# EAGLE board schematic (EAGLE 8.7.1), part 1 of 4
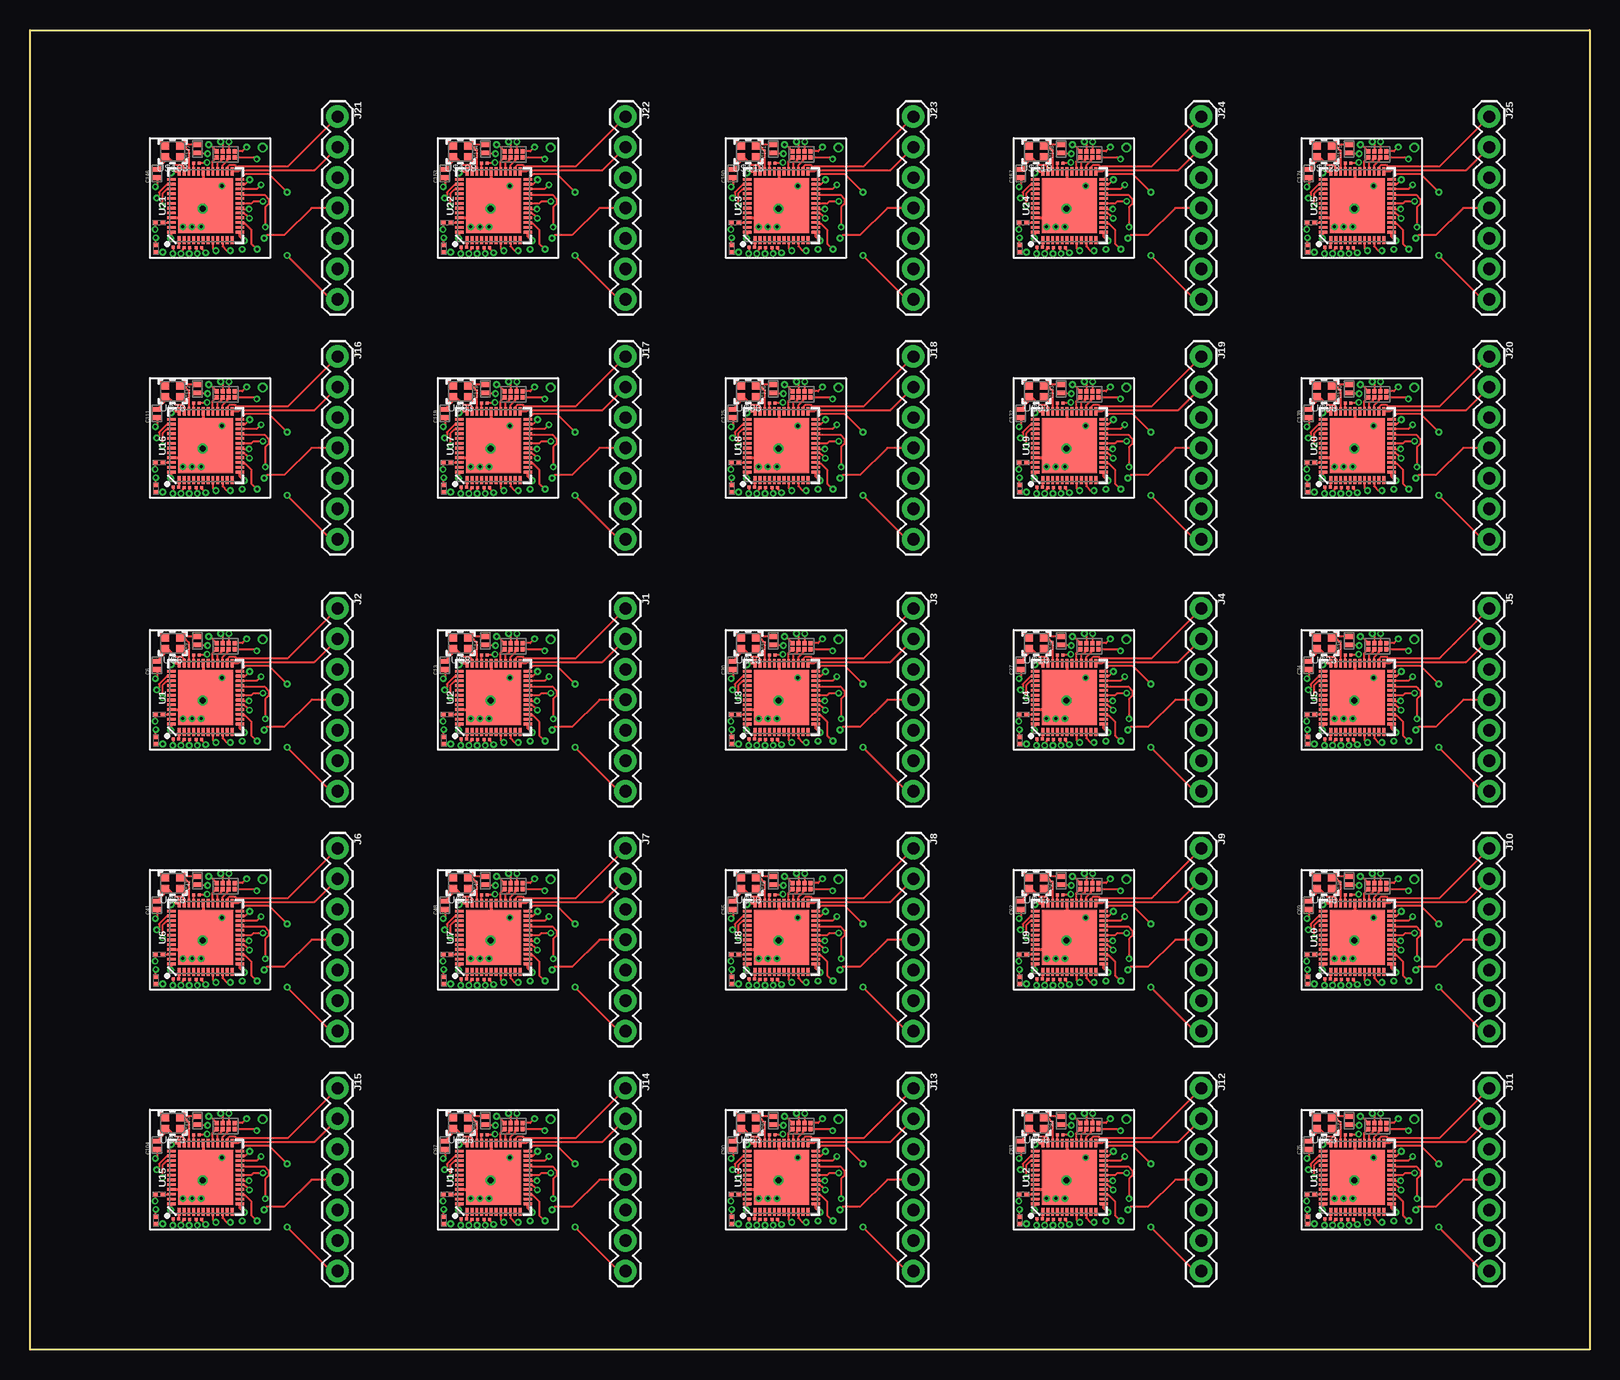
[diagram p0: board, top side]
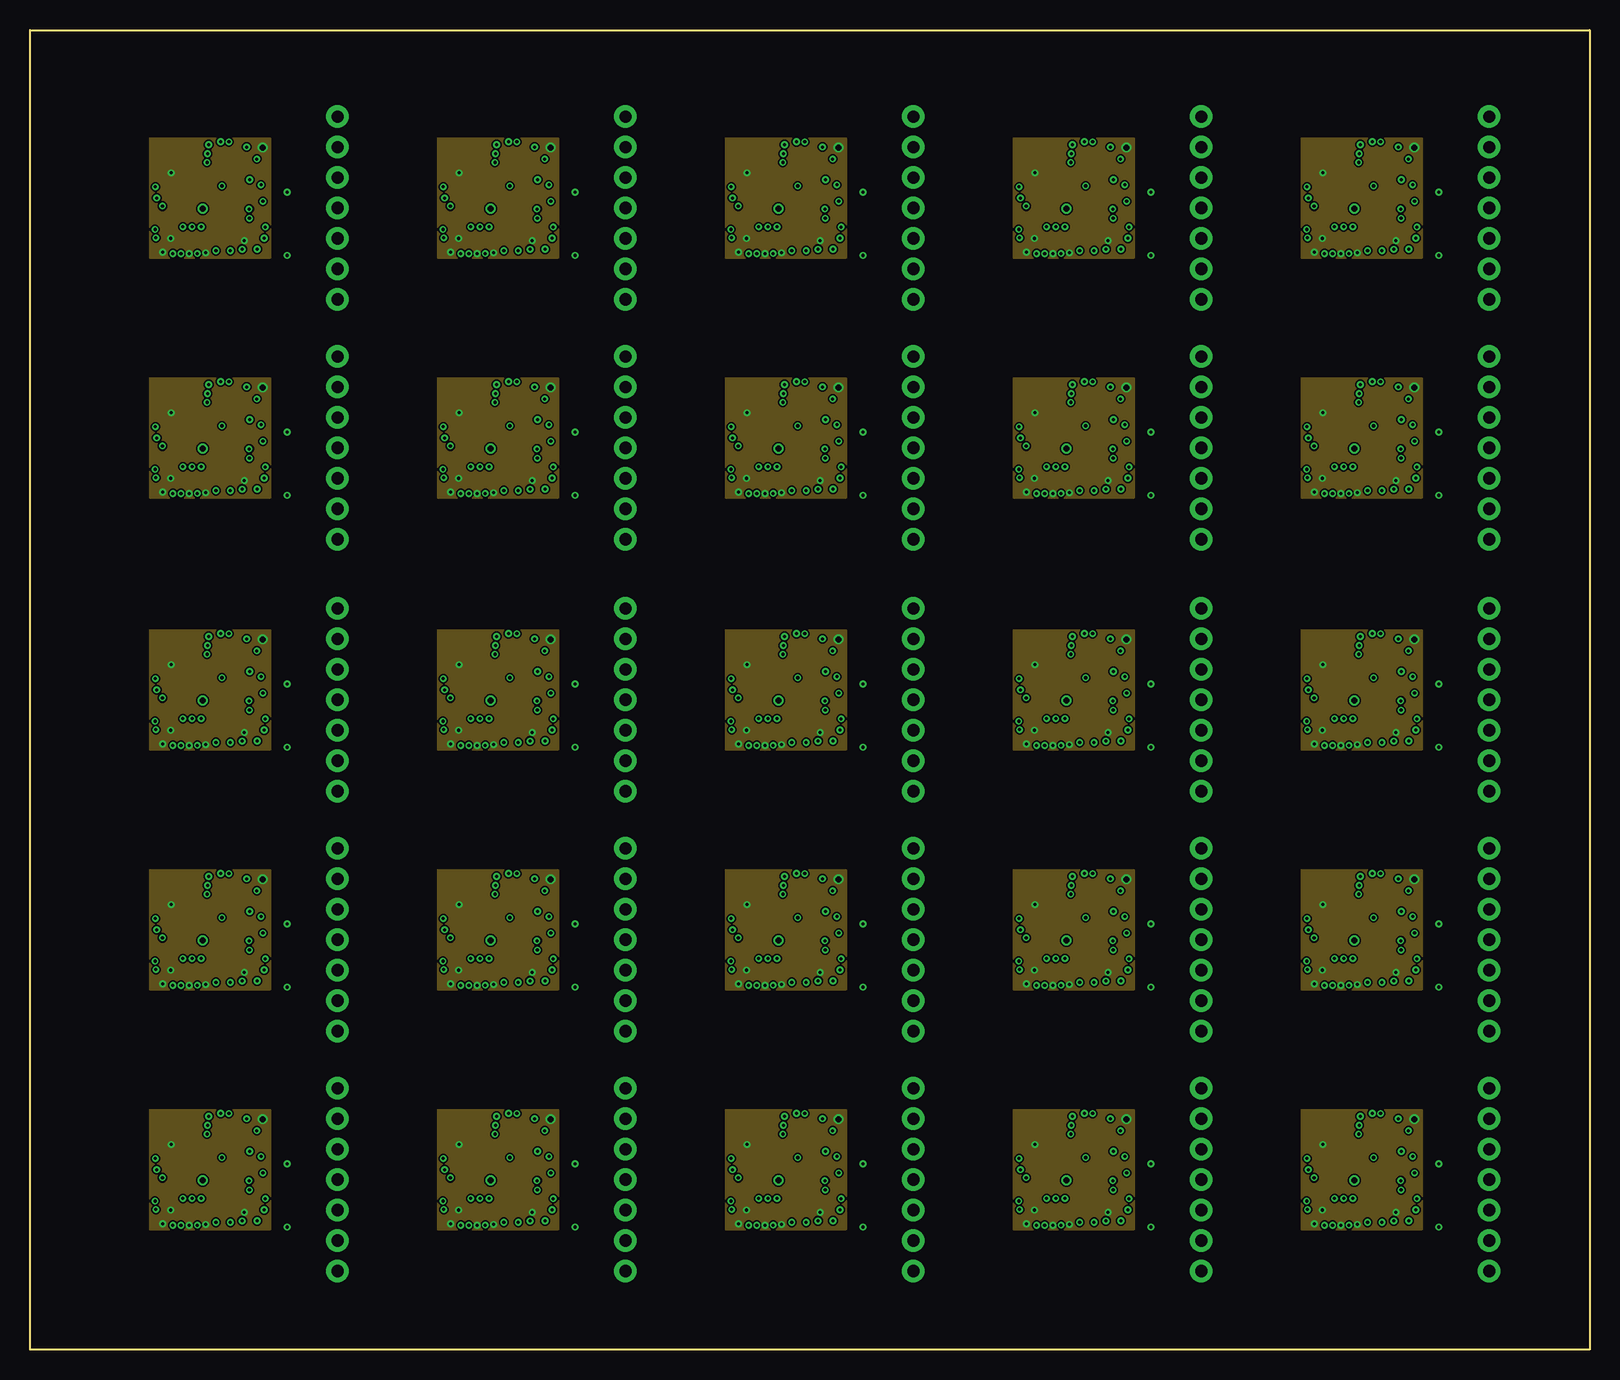
[diagram p1: board, inner layer Route8]
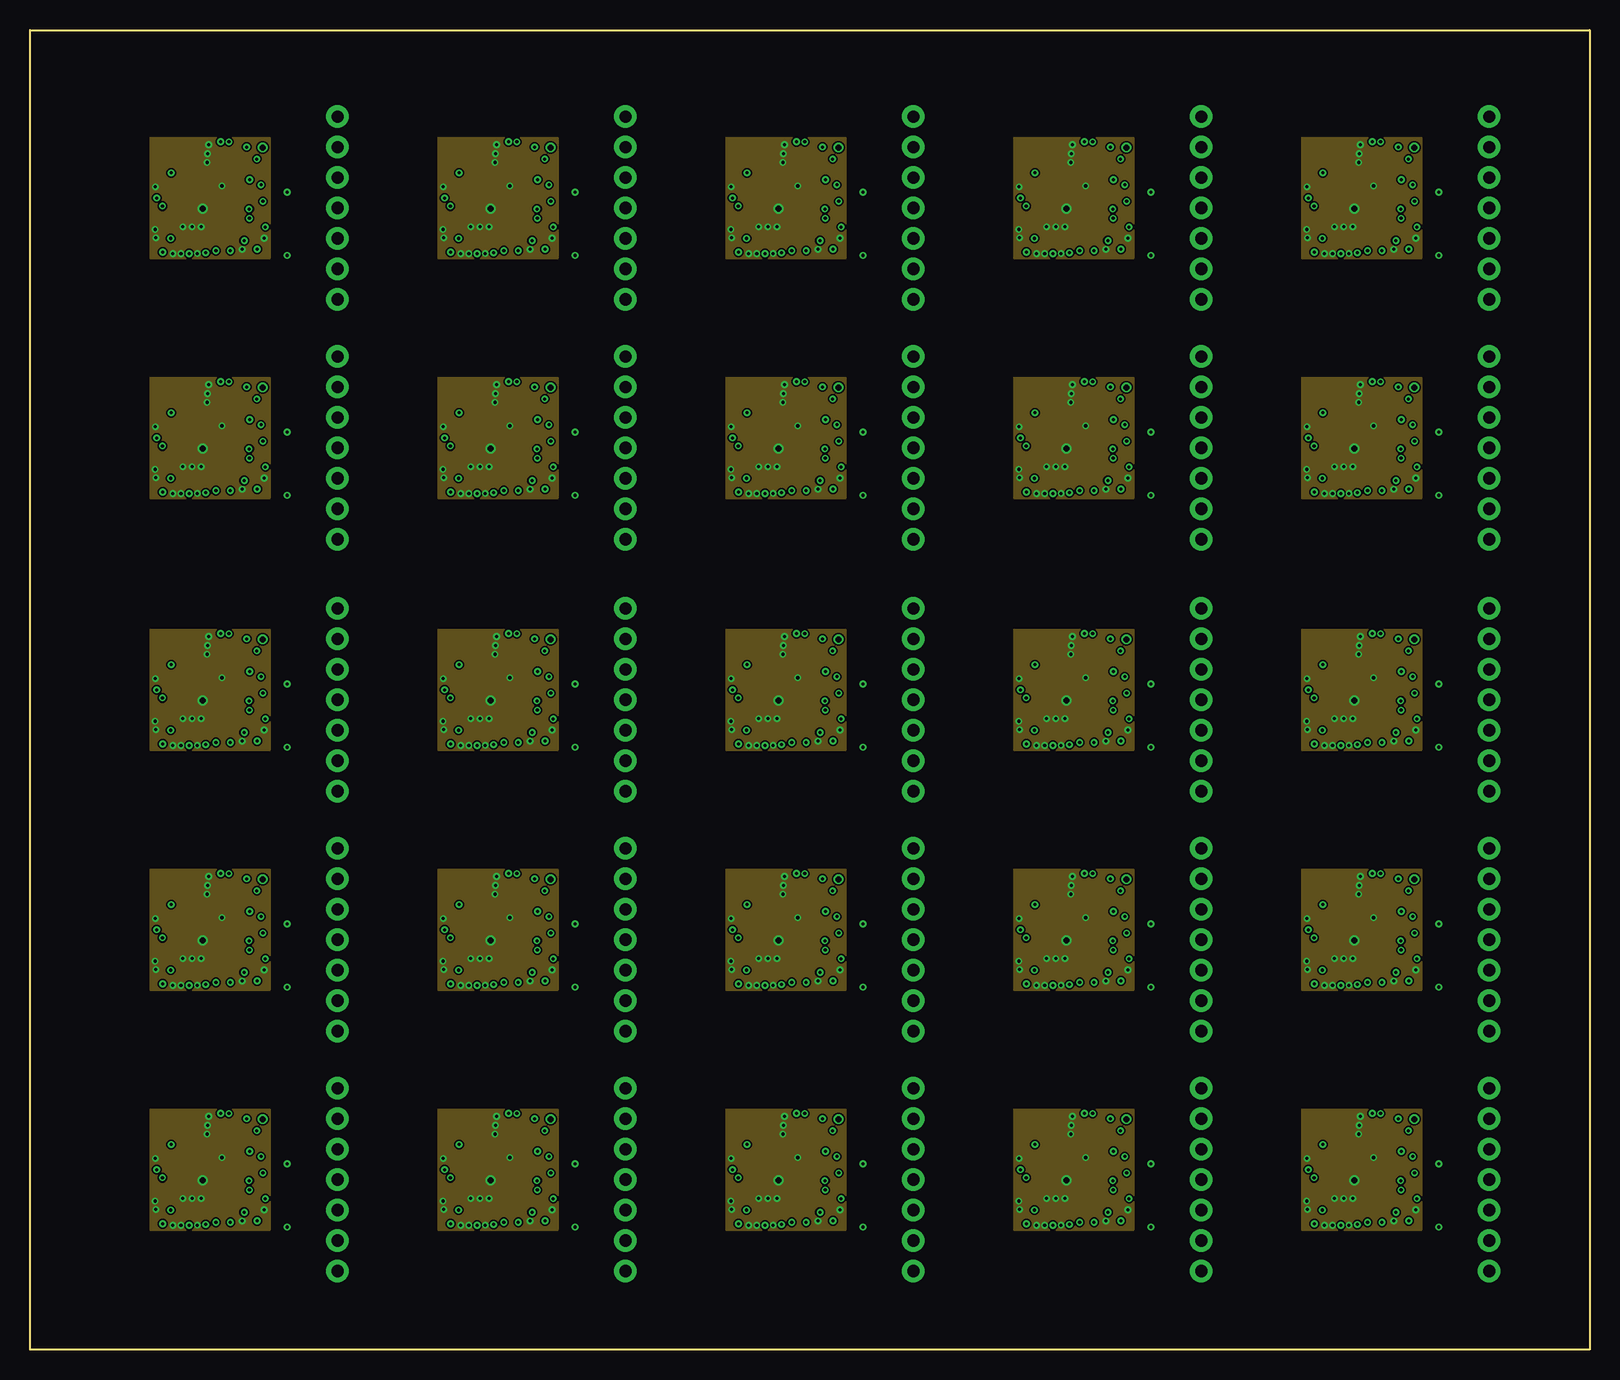
[diagram p2: board, inner layer Route10]
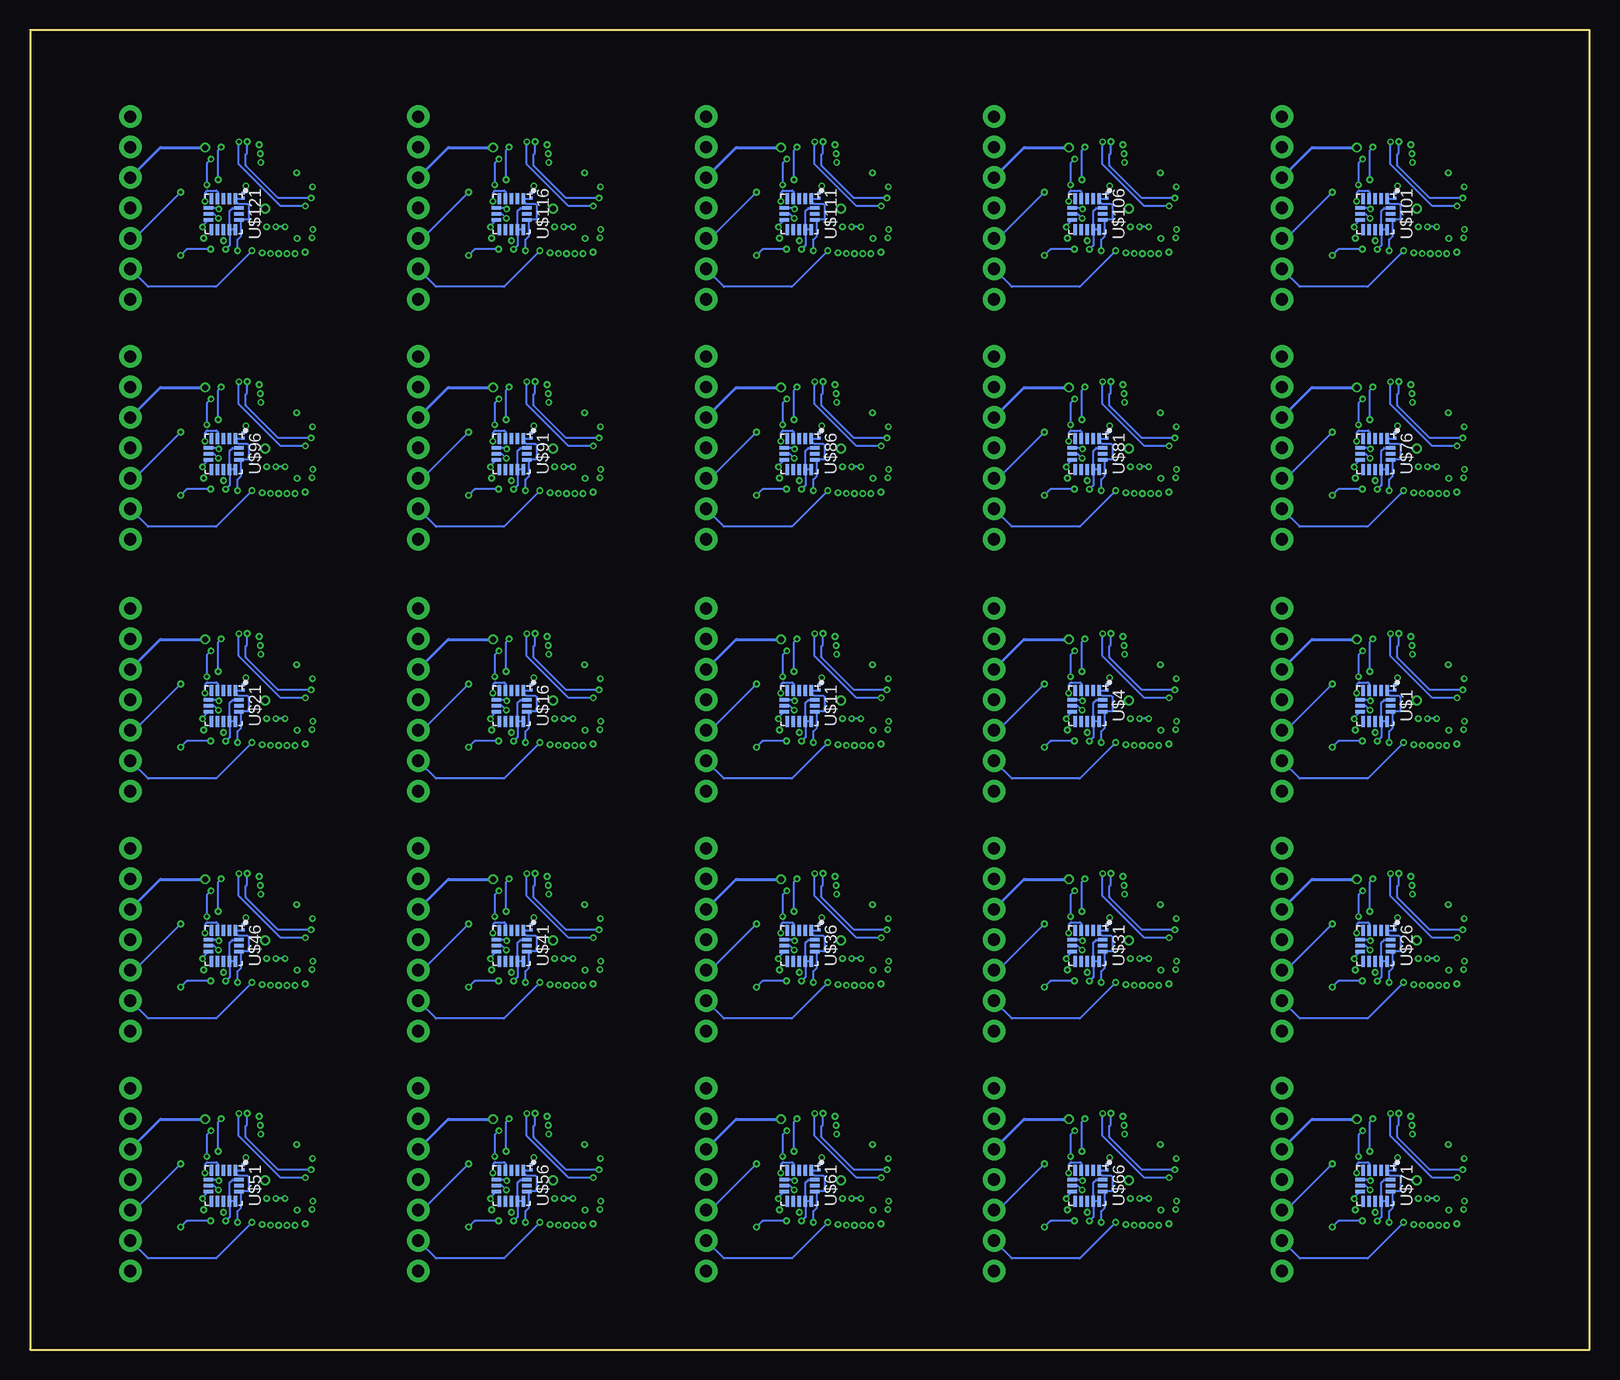
[diagram p3: board, bottom side, seen from below]

Size 130 x 110 mm. Coordinates in mm from the lower left corner, seen from the top.
Outline: 130,0 0,0 0,110 130,110 130,0
Copper layers (1*8*10*16): Top 0.035mm / dielectric 0.42mm / Route8 0.035mm / dielectric 0.62mm / Route10 0.035mm / dielectric 0.42mm / Bottom 0.035mm
Design rules "default *": minimum track width 6mil, minimum drill 10mil, track to track 5mil, track to pad 5mil, pad to pad 5mil, via to via 5mil, smd to smd 2mil, copper to edge 40mil, drill to drill 6mil, minimum pad ring 10mil, minimum via ring 6mil, stop-mask expansion 4mil, vias tented up to drill 0mil, thermal gap 10mil

## Footprints (pad centres in the part's own frame; a part is rotated, then mirrored left to right if it is on the bottom)
CAP_0402-L = smd 0.25 x 0.25: 1 -0.229,0; 2 0.229,0
CAPC1005X55N = smd 0.4 x 0.6: 1 -0.4,0; 2 0.3,0
1X07 = drill 1.016 pad 1.88: 1 0,0; 2 2.54,0; 3 5.08,0; 4 7.62,0; 5 10.16,0; 6 12.7,0; 7 15.24,0
QFN48-6X6MM = smd 0.68 x 0.23: 1 -2.86,2.2; 2 -2.86,1.8; 3 -2.86,1.4; 4 -2.86,1; 5 -2.86,0.6; 6 -2.86,0.2; 7 -2.86,-0.2; 8 -2.86,-0.6; 9 -2.86,-1; 10 -2.86,-1.4; 11 -2.86,-1.8; 12 -2.86,-2.2; 25 2.86,-2.2; 26 2.86,-1.8; 27 2.86,-1.4; 28 2.86,-1; 29 2.86,-0.6; 30 2.86,-0.2; 31 2.86,0.2; 32 2.86,0.6; 33 2.86,1; 34 2.86,1.4; 35 2.86,1.8; 36 2.86,2.2 | smd 0.23 x 0.68: 13 -2.2,-2.86; 14 -1.8,-2.86; 15 -1.4,-2.86; 16 -1,-2.86; 17 -0.6,-2.86; 18 -0.2,-2.86; 19 0.2,-2.86; 20 0.6,-2.86; 21 1,-2.86; 22 1.4,-2.86; 23 1.8,-2.86; 24 2.2,-2.86; 37 2.2,2.86; 38 1.8,2.86; 39 1.4,2.86; 40 1,2.86; 41 0.6,2.86; 42 0.2,2.86; 43 -0.2,2.86; 44 -0.6,2.86; 45 -1,2.86; 46 -1.4,2.86; 47 -1.8,2.86; 48 -2.2,2.86 | smd 4.6 x 4.6: EP 0,0
TFLGA-16/3.3MMX3.1MM = smd 0.3 x 0.8: CS 0.5,-1.275; GND@3 -0.5,1.275; MISO 0,-1.275; MOSI -0.5,-1.275; NC@2 0,1.275; VS 0.5,1.275 | smd 0.925 x 0.3: GND@1 1.288,0.5; GND@2 1.288,1; INT1 1.288,0; INT2 1.288,-1; NC@1 -1.288,0.5; RESERVED@1 -1.288,0; RESERVED@2 -1.288,-1; RESERVED@3 1.288,-0.5; SCLK -1.288,-0.5; VDD/IO -1.288,1
4P7UFCAPACITOR = smd 0.35 x 0.4: P$3 0.18,0.15; P$4 0.8,0.15
AT25SF161-UUD-T = smd 0.35 x 0.35: 1 1.2,0.9; 2 1.2,0.4; 3 1.2,-0.1; 4 1.2,-0.6; 5 0.7,0.9; 6 0.7,0.4; 7 0.7,-0.1; 8 0.7,-0.6
32MHZCRYSTAL = smd 0.75 x 0.7: 1 0.485,0.47; 2 1.835,0.47; 3 1.835,1.47; 4 0.485,1.47
1UFCAPACITOR = smd 0.35 x 0.4: P$3 0.18,0.15; P$4 0.8,0.15

## Placement (x,y rotation side)
C1  C0402X5R0G104M020BCCAP_0402-L  [CAP_0402-L]  16.24,55.19 270 bottom
C2  C0402X5R0G104M020BCCAP_0402-L  [CAP_0402-L]  12.19,50.88 180 top
C3  C0402X5R0G104M020BCCAP_0402-L  [CAP_0402-L]  14.07,50.87 0 top
C4  C0402X5R0G104M020BCCAP_0402-L  [CAP_0402-L]  13.09,50.87 0 top
C5  C0402C0G1C101J020BCCAP_0402-L  [CAP_0402-L]  13.86,57.88 0 top
C6  GRM1555C1H6R0CA01D  [CAPC1005X55N]  10.59,57.08 90 top
C7  GRM1555C1H6R0CA01D  [CAPC1005X55N]  13.96,59.14 90 top
C8  C0402X5R0G104M020BCCAP_0402-L  [CAP_0402-L]  40.24,55.19 270 bottom
C9  C0402X5R0G104M020BCCAP_0402-L  [CAP_0402-L]  36.19,50.88 180 top
C10  C0402X5R0G104M020BCCAP_0402-L  [CAP_0402-L]  38.07,50.87 0 top
C11  C0402X5R0G104M020BCCAP_0402-L  [CAP_0402-L]  37.09,50.87 0 top
C12  C0402C0G1C101J020BCCAP_0402-L  [CAP_0402-L]  37.86,57.88 0 top
C13  GRM1555C1H6R0CA01D  [CAPC1005X55N]  34.59,57.08 90 top
C14  GRM1555C1H6R0CA01D  [CAPC1005X55N]  37.96,59.14 90 top
C15  C0402X5R0G104M020BCCAP_0402-L  [CAP_0402-L]  64.24,55.19 270 bottom
C16  C0402X5R0G104M020BCCAP_0402-L  [CAP_0402-L]  60.19,50.88 180 top
C17  C0402X5R0G104M020BCCAP_0402-L  [CAP_0402-L]  62.07,50.87 0 top
C18  C0402X5R0G104M020BCCAP_0402-L  [CAP_0402-L]  61.09,50.87 0 top
C19  C0402C0G1C101J020BCCAP_0402-L  [CAP_0402-L]  61.86,57.88 0 top
C20  GRM1555C1H6R0CA01D  [CAPC1005X55N]  58.59,57.08 90 top
C21  GRM1555C1H6R0CA01D  [CAPC1005X55N]  61.96,59.14 90 top
C22  C0402X5R0G104M020BCCAP_0402-L  [CAP_0402-L]  88.24,55.19 270 bottom
C23  C0402X5R0G104M020BCCAP_0402-L  [CAP_0402-L]  84.19,50.88 180 top
C24  C0402X5R0G104M020BCCAP_0402-L  [CAP_0402-L]  86.07,50.87 0 top
C25  C0402X5R0G104M020BCCAP_0402-L  [CAP_0402-L]  85.09,50.87 0 top
C26  C0402C0G1C101J020BCCAP_0402-L  [CAP_0402-L]  85.86,57.88 0 top
C27  GRM1555C1H6R0CA01D  [CAPC1005X55N]  82.59,57.08 90 top
C28  GRM1555C1H6R0CA01D  [CAPC1005X55N]  85.96,59.14 90 top
C29  C0402X5R0G104M020BCCAP_0402-L  [CAP_0402-L]  112.24,55.19 270 bottom
C30  C0402X5R0G104M020BCCAP_0402-L  [CAP_0402-L]  108.19,50.88 180 top
C31  C0402X5R0G104M020BCCAP_0402-L  [CAP_0402-L]  110.07,50.87 0 top
C32  C0402X5R0G104M020BCCAP_0402-L  [CAP_0402-L]  109.09,50.87 0 top
C33  C0402C0G1C101J020BCCAP_0402-L  [CAP_0402-L]  109.86,57.88 0 top
C34  GRM1555C1H6R0CA01D  [CAPC1005X55N]  106.59,57.08 90 top
C35  GRM1555C1H6R0CA01D  [CAPC1005X55N]  109.96,59.14 90 top
C36  C0402X5R0G104M020BCCAP_0402-L  [CAP_0402-L]  16.24,35.19 270 bottom
C37  C0402X5R0G104M020BCCAP_0402-L  [CAP_0402-L]  12.19,30.88 180 top
C38  C0402X5R0G104M020BCCAP_0402-L  [CAP_0402-L]  14.07,30.87 0 top
C39  C0402X5R0G104M020BCCAP_0402-L  [CAP_0402-L]  13.09,30.87 0 top
C40  C0402C0G1C101J020BCCAP_0402-L  [CAP_0402-L]  13.86,37.88 0 top
C41  GRM1555C1H6R0CA01D  [CAPC1005X55N]  10.59,37.08 90 top
C42  GRM1555C1H6R0CA01D  [CAPC1005X55N]  13.96,39.14 90 top
C43  C0402X5R0G104M020BCCAP_0402-L  [CAP_0402-L]  40.24,35.19 270 bottom
C44  C0402X5R0G104M020BCCAP_0402-L  [CAP_0402-L]  36.19,30.88 180 top
C45  C0402X5R0G104M020BCCAP_0402-L  [CAP_0402-L]  38.07,30.87 0 top
C46  C0402X5R0G104M020BCCAP_0402-L  [CAP_0402-L]  37.09,30.87 0 top
C47  C0402C0G1C101J020BCCAP_0402-L  [CAP_0402-L]  37.86,37.88 0 top
C48  GRM1555C1H6R0CA01D  [CAPC1005X55N]  34.59,37.08 90 top
C49  GRM1555C1H6R0CA01D  [CAPC1005X55N]  37.96,39.14 90 top
C50  C0402X5R0G104M020BCCAP_0402-L  [CAP_0402-L]  64.24,35.19 270 bottom
C51  C0402X5R0G104M020BCCAP_0402-L  [CAP_0402-L]  60.19,30.88 180 top
C52  C0402X5R0G104M020BCCAP_0402-L  [CAP_0402-L]  62.07,30.87 0 top
C53  C0402X5R0G104M020BCCAP_0402-L  [CAP_0402-L]  61.09,30.87 0 top
C54  C0402C0G1C101J020BCCAP_0402-L  [CAP_0402-L]  61.86,37.88 0 top
C55  GRM1555C1H6R0CA01D  [CAPC1005X55N]  58.59,37.08 90 top
C56  GRM1555C1H6R0CA01D  [CAPC1005X55N]  61.96,39.14 90 top
C57  C0402X5R0G104M020BCCAP_0402-L  [CAP_0402-L]  88.24,35.19 270 bottom
C58  C0402X5R0G104M020BCCAP_0402-L  [CAP_0402-L]  84.19,30.88 180 top
C59  C0402X5R0G104M020BCCAP_0402-L  [CAP_0402-L]  86.07,30.87 0 top
C60  C0402X5R0G104M020BCCAP_0402-L  [CAP_0402-L]  85.09,30.87 0 top
C61  C0402C0G1C101J020BCCAP_0402-L  [CAP_0402-L]  85.86,37.88 0 top
C62  GRM1555C1H6R0CA01D  [CAPC1005X55N]  82.59,37.08 90 top
C63  GRM1555C1H6R0CA01D  [CAPC1005X55N]  85.96,39.14 90 top
C64  C0402X5R0G104M020BCCAP_0402-L  [CAP_0402-L]  112.24,35.19 270 bottom
C65  C0402X5R0G104M020BCCAP_0402-L  [CAP_0402-L]  108.19,30.88 180 top
C66  C0402X5R0G104M020BCCAP_0402-L  [CAP_0402-L]  110.07,30.87 0 top
C67  C0402X5R0G104M020BCCAP_0402-L  [CAP_0402-L]  109.09,30.87 0 top
C68  C0402C0G1C101J020BCCAP_0402-L  [CAP_0402-L]  109.86,37.88 0 top
C69  GRM1555C1H6R0CA01D  [CAPC1005X55N]  106.59,37.08 90 top
C70  GRM1555C1H6R0CA01D  [CAPC1005X55N]  109.96,39.14 90 top
C71  C0402X5R0G104M020BCCAP_0402-L  [CAP_0402-L]  112.24,15.19 270 bottom
C72  C0402X5R0G104M020BCCAP_0402-L  [CAP_0402-L]  108.19,10.88 180 top
C73  C0402X5R0G104M020BCCAP_0402-L  [CAP_0402-L]  110.07,10.87 0 top
C74  C0402X5R0G104M020BCCAP_0402-L  [CAP_0402-L]  109.09,10.87 0 top
C75  C0402C0G1C101J020BCCAP_0402-L  [CAP_0402-L]  109.86,17.88 0 top
C76  GRM1555C1H6R0CA01D  [CAPC1005X55N]  106.59,17.08 90 top
C77  GRM1555C1H6R0CA01D  [CAPC1005X55N]  109.96,19.14 90 top
C78  C0402X5R0G104M020BCCAP_0402-L  [CAP_0402-L]  88.24,15.19 270 bottom
C79  C0402X5R0G104M020BCCAP_0402-L  [CAP_0402-L]  84.19,10.88 180 top
C80  C0402X5R0G104M020BCCAP_0402-L  [CAP_0402-L]  86.07,10.87 0 top
C81  C0402X5R0G104M020BCCAP_0402-L  [CAP_0402-L]  85.09,10.87 0 top
C82  C0402C0G1C101J020BCCAP_0402-L  [CAP_0402-L]  85.86,17.88 0 top
C83  GRM1555C1H6R0CA01D  [CAPC1005X55N]  82.59,17.08 90 top
C84  GRM1555C1H6R0CA01D  [CAPC1005X55N]  85.96,19.14 90 top
C85  C0402X5R0G104M020BCCAP_0402-L  [CAP_0402-L]  64.24,15.19 270 bottom
C86  C0402X5R0G104M020BCCAP_0402-L  [CAP_0402-L]  60.19,10.88 180 top
C87  C0402X5R0G104M020BCCAP_0402-L  [CAP_0402-L]  62.07,10.87 0 top
C88  C0402X5R0G104M020BCCAP_0402-L  [CAP_0402-L]  61.09,10.87 0 top
C89  C0402C0G1C101J020BCCAP_0402-L  [CAP_0402-L]  61.86,17.88 0 top
C90  GRM1555C1H6R0CA01D  [CAPC1005X55N]  58.59,17.08 90 top
C91  GRM1555C1H6R0CA01D  [CAPC1005X55N]  61.96,19.14 90 top
C92  C0402X5R0G104M020BCCAP_0402-L  [CAP_0402-L]  40.24,15.19 270 bottom
C93  C0402X5R0G104M020BCCAP_0402-L  [CAP_0402-L]  36.19,10.88 180 top
C94  C0402X5R0G104M020BCCAP_0402-L  [CAP_0402-L]  38.07,10.87 0 top
C95  C0402X5R0G104M020BCCAP_0402-L  [CAP_0402-L]  37.09,10.87 0 top
C96  C0402C0G1C101J020BCCAP_0402-L  [CAP_0402-L]  37.86,17.88 0 top
C97  GRM1555C1H6R0CA01D  [CAPC1005X55N]  34.59,17.08 90 top
C98  GRM1555C1H6R0CA01D  [CAPC1005X55N]  37.96,19.14 90 top
C99  C0402X5R0G104M020BCCAP_0402-L  [CAP_0402-L]  16.24,15.19 270 bottom
C100  C0402X5R0G104M020BCCAP_0402-L  [CAP_0402-L]  12.19,10.88 180 top
C101  C0402X5R0G104M020BCCAP_0402-L  [CAP_0402-L]  14.07,10.87 0 top
C102  C0402X5R0G104M020BCCAP_0402-L  [CAP_0402-L]  13.09,10.87 0 top
C103  C0402C0G1C101J020BCCAP_0402-L  [CAP_0402-L]  13.86,17.88 0 top
C104  GRM1555C1H6R0CA01D  [CAPC1005X55N]  10.59,17.08 90 top
C105  GRM1555C1H6R0CA01D  [CAPC1005X55N]  13.96,19.14 90 top
C106  C0402X5R0G104M020BCCAP_0402-L  [CAP_0402-L]  16.24,76.19 270 bottom
C107  C0402X5R0G104M020BCCAP_0402-L  [CAP_0402-L]  12.19,71.88 180 top
C108  C0402X5R0G104M020BCCAP_0402-L  [CAP_0402-L]  14.07,71.87 0 top
C109  C0402X5R0G104M020BCCAP_0402-L  [CAP_0402-L]  13.09,71.87 0 top
C110  C0402C0G1C101J020BCCAP_0402-L  [CAP_0402-L]  13.86,78.88 0 top
C111  GRM1555C1H6R0CA01D  [CAPC1005X55N]  10.59,78.08 90 top
C112  GRM1555C1H6R0CA01D  [CAPC1005X55N]  13.96,80.14 90 top
C113  C0402X5R0G104M020BCCAP_0402-L  [CAP_0402-L]  40.24,76.19 270 bottom
C114  C0402X5R0G104M020BCCAP_0402-L  [CAP_0402-L]  36.19,71.88 180 top
C115  C0402X5R0G104M020BCCAP_0402-L  [CAP_0402-L]  38.07,71.87 0 top
C116  C0402X5R0G104M020BCCAP_0402-L  [CAP_0402-L]  37.09,71.87 0 top
C117  C0402C0G1C101J020BCCAP_0402-L  [CAP_0402-L]  37.86,78.88 0 top
C118  GRM1555C1H6R0CA01D  [CAPC1005X55N]  34.59,78.08 90 top
C119  GRM1555C1H6R0CA01D  [CAPC1005X55N]  37.96,80.14 90 top
C120  C0402X5R0G104M020BCCAP_0402-L  [CAP_0402-L]  64.24,76.19 270 bottom
C121  C0402X5R0G104M020BCCAP_0402-L  [CAP_0402-L]  60.19,71.88 180 top
C122  C0402X5R0G104M020BCCAP_0402-L  [CAP_0402-L]  62.07,71.87 0 top
C123  C0402X5R0G104M020BCCAP_0402-L  [CAP_0402-L]  61.09,71.87 0 top
C124  C0402C0G1C101J020BCCAP_0402-L  [CAP_0402-L]  61.86,78.88 0 top
C125  GRM1555C1H6R0CA01D  [CAPC1005X55N]  58.59,78.08 90 top
C126  GRM1555C1H6R0CA01D  [CAPC1005X55N]  61.96,80.14 90 top
C127  C0402X5R0G104M020BCCAP_0402-L  [CAP_0402-L]  88.24,76.19 270 bottom
C128  C0402X5R0G104M020BCCAP_0402-L  [CAP_0402-L]  84.19,71.88 180 top
C129  C0402X5R0G104M020BCCAP_0402-L  [CAP_0402-L]  86.07,71.87 0 top
C130  C0402X5R0G104M020BCCAP_0402-L  [CAP_0402-L]  85.09,71.87 0 top
C131  C0402C0G1C101J020BCCAP_0402-L  [CAP_0402-L]  85.86,78.88 0 top
C132  GRM1555C1H6R0CA01D  [CAPC1005X55N]  82.59,78.08 90 top
C133  GRM1555C1H6R0CA01D  [CAPC1005X55N]  85.96,80.14 90 top
C134  C0402X5R0G104M020BCCAP_0402-L  [CAP_0402-L]  112.24,76.19 270 bottom
C135  C0402X5R0G104M020BCCAP_0402-L  [CAP_0402-L]  108.19,71.88 180 top
C136  C0402X5R0G104M020BCCAP_0402-L  [CAP_0402-L]  110.07,71.87 0 top
C137  C0402X5R0G104M020BCCAP_0402-L  [CAP_0402-L]  109.09,71.87 0 top
C138  C0402C0G1C101J020BCCAP_0402-L  [CAP_0402-L]  109.86,78.88 0 top
C139  GRM1555C1H6R0CA01D  [CAPC1005X55N]  106.59,78.08 90 top
C140  GRM1555C1H6R0CA01D  [CAPC1005X55N]  109.96,80.14 90 top
C141  C0402X5R0G104M020BCCAP_0402-L  [CAP_0402-L]  16.24,96.19 270 bottom
C142  C0402X5R0G104M020BCCAP_0402-L  [CAP_0402-L]  12.19,91.88 180 top
C143  C0402X5R0G104M020BCCAP_0402-L  [CAP_0402-L]  14.07,91.87 0 top
C144  C0402X5R0G104M020BCCAP_0402-L  [CAP_0402-L]  13.09,91.87 0 top
C145  C0402C0G1C101J020BCCAP_0402-L  [CAP_0402-L]  13.86,98.88 0 top
C146  GRM1555C1H6R0CA01D  [CAPC1005X55N]  10.59,98.08 90 top
C147  GRM1555C1H6R0CA01D  [CAPC1005X55N]  13.96,100.14 90 top
C148  C0402X5R0G104M020BCCAP_0402-L  [CAP_0402-L]  40.24,96.19 270 bottom
C149  C0402X5R0G104M020BCCAP_0402-L  [CAP_0402-L]  36.19,91.88 180 top
C150  C0402X5R0G104M020BCCAP_0402-L  [CAP_0402-L]  38.07,91.87 0 top
C151  C0402X5R0G104M020BCCAP_0402-L  [CAP_0402-L]  37.09,91.87 0 top
C152  C0402C0G1C101J020BCCAP_0402-L  [CAP_0402-L]  37.86,98.88 0 top
C153  GRM1555C1H6R0CA01D  [CAPC1005X55N]  34.59,98.08 90 top
C154  GRM1555C1H6R0CA01D  [CAPC1005X55N]  37.96,100.14 90 top
C155  C0402X5R0G104M020BCCAP_0402-L  [CAP_0402-L]  64.24,96.19 270 bottom
C156  C0402X5R0G104M020BCCAP_0402-L  [CAP_0402-L]  60.19,91.88 180 top
C157  C0402X5R0G104M020BCCAP_0402-L  [CAP_0402-L]  62.07,91.87 0 top
C158  C0402X5R0G104M020BCCAP_0402-L  [CAP_0402-L]  61.09,91.87 0 top
C159  C0402C0G1C101J020BCCAP_0402-L  [CAP_0402-L]  61.86,98.88 0 top
C160  GRM1555C1H6R0CA01D  [CAPC1005X55N]  58.59,98.08 90 top
C161  GRM1555C1H6R0CA01D  [CAPC1005X55N]  61.96,100.14 90 top
C162  C0402X5R0G104M020BCCAP_0402-L  [CAP_0402-L]  88.24,96.19 270 bottom
C163  C0402X5R0G104M020BCCAP_0402-L  [CAP_0402-L]  84.19,91.88 180 top
C164  C0402X5R0G104M020BCCAP_0402-L  [CAP_0402-L]  86.07,91.87 0 top
C165  C0402X5R0G104M020BCCAP_0402-L  [CAP_0402-L]  85.09,91.87 0 top
C166  C0402C0G1C101J020BCCAP_0402-L  [CAP_0402-L]  85.86,98.88 0 top
C167  GRM1555C1H6R0CA01D  [CAPC1005X55N]  82.59,98.08 90 top
C168  GRM1555C1H6R0CA01D  [CAPC1005X55N]  85.96,100.14 90 top
C169  C0402X5R0G104M020BCCAP_0402-L  [CAP_0402-L]  112.24,96.19 270 bottom
C170  C0402X5R0G104M020BCCAP_0402-L  [CAP_0402-L]  108.19,91.88 180 top
C171  C0402X5R0G104M020BCCAP_0402-L  [CAP_0402-L]  110.07,91.87 0 top
C172  C0402X5R0G104M020BCCAP_0402-L  [CAP_0402-L]  109.09,91.87 0 top
C173  C0402C0G1C101J020BCCAP_0402-L  [CAP_0402-L]  109.86,98.88 0 top
C174  GRM1555C1H6R0CA01D  [CAPC1005X55N]  106.59,98.08 90 top
C175  GRM1555C1H6R0CA01D  [CAPC1005X55N]  109.96,100.14 90 top
J1  header  [1X07]  49.64,61.78 270 top
J2  header  [1X07]  25.64,61.78 270 top
J3  header  [1X07]  73.64,61.78 270 top
J4  header  [1X07]  97.64,61.78 270 top
J5  header  [1X07]  121.64,61.78 270 top
J6  header  [1X07]  25.64,41.78 270 top
J7  header  [1X07]  49.64,41.78 270 top
J8  header  [1X07]  73.64,41.78 270 top
J9  header  [1X07]  97.64,41.78 270 top
J10  header  [1X07]  121.64,41.78 270 top
J11  header  [1X07]  121.64,21.78 270 top
J12  header  [1X07]  97.64,21.78 270 top
J13  header  [1X07]  73.64,21.78 270 top
J14  header  [1X07]  49.64,21.78 270 top
J15  header  [1X07]  25.64,21.78 270 top
J16  header  [1X07]  25.64,82.78 270 top
J17  header  [1X07]  49.64,82.78 270 top
J18  header  [1X07]  73.64,82.78 270 top
J19  header  [1X07]  97.64,82.78 270 top
J20  header  [1X07]  121.64,82.78 270 top
J21  header  [1X07]  25.64,102.78 270 top
J22  header  [1X07]  49.64,102.78 270 top
J23  header  [1X07]  73.64,102.78 270 top
J24  header  [1X07]  97.64,102.78 270 top
J25  header  [1X07]  121.64,102.78 270 top
U1  NRF52832  [QFN48-6X6MM]  14.65,54.35 90 top
U2  NRF52832  [QFN48-6X6MM]  38.65,54.35 90 top
U3  NRF52832  [QFN48-6X6MM]  62.65,54.35 90 top
U4  NRF52832  [QFN48-6X6MM]  86.65,54.35 90 top
U5  NRF52832  [QFN48-6X6MM]  110.65,54.35 90 top
U6  NRF52832  [QFN48-6X6MM]  14.65,34.35 90 top
U7  NRF52832  [QFN48-6X6MM]  38.65,34.35 90 top
U8  NRF52832  [QFN48-6X6MM]  62.65,34.35 90 top
U9  NRF52832  [QFN48-6X6MM]  86.65,34.35 90 top
U10  NRF52832  [QFN48-6X6MM]  110.65,34.35 90 top
U11  NRF52832  [QFN48-6X6MM]  110.65,14.35 90 top
U12  NRF52832  [QFN48-6X6MM]  86.65,14.35 90 top
U13  NRF52832  [QFN48-6X6MM]  62.65,14.35 90 top
U14  NRF52832  [QFN48-6X6MM]  38.65,14.35 90 top
U15  NRF52832  [QFN48-6X6MM]  14.65,14.35 90 top
U16  NRF52832  [QFN48-6X6MM]  14.65,75.35 90 top
U17  NRF52832  [QFN48-6X6MM]  38.65,75.35 90 top
U18  NRF52832  [QFN48-6X6MM]  62.65,75.35 90 top
U19  NRF52832  [QFN48-6X6MM]  86.65,75.35 90 top
U20  NRF52832  [QFN48-6X6MM]  110.65,75.35 90 top
U21  NRF52832  [QFN48-6X6MM]  14.65,95.35 90 top
U22  NRF52832  [QFN48-6X6MM]  38.65,95.35 90 top
U23  NRF52832  [QFN48-6X6MM]  62.65,95.35 90 top
U24  NRF52832  [QFN48-6X6MM]  86.65,95.35 90 top
U25  NRF52832  [QFN48-6X6MM]  110.65,95.35 90 top
U$1  ADXL362  [TFLGA-16/3.3MMX3.1MM]  17.86,53.66 270 bottom
U$2  4P7UFCAPACITOR  [4P7UFCAPACITOR]  10.65,50.28 90 top
U$3  AT25SF161-UUD-T  [AT25SF161-UUD-T]  16.17,59.58 270 top
U$4  ADXL362  [TFLGA-16/3.3MMX3.1MM]  41.86,53.66 270 bottom
U$5  4P7UFCAPACITOR  [4P7UFCAPACITOR]  34.65,50.28 90 top
U$6  32MHZCRYSTAL  [32MHZCRYSTAL]  13.05,59.85 180 top
U$7  1UFCAPACITOR  [1UFCAPACITOR]  10.27,52.79 0 top
U$8  32MHZCRYSTAL  [32MHZCRYSTAL]  37.05,59.85 180 top
U$9  1UFCAPACITOR  [1UFCAPACITOR]  34.27,52.79 0 top
U$10  AT25SF161-UUD-T  [AT25SF161-UUD-T]  40.17,59.58 270 top
U$11  ADXL362  [TFLGA-16/3.3MMX3.1MM]  65.86,53.66 270 bottom
U$12  4P7UFCAPACITOR  [4P7UFCAPACITOR]  58.65,50.28 90 top
U$13  32MHZCRYSTAL  [32MHZCRYSTAL]  61.05,59.85 180 top
U$14  1UFCAPACITOR  [1UFCAPACITOR]  58.27,52.79 0 top
U$15  AT25SF161-UUD-T  [AT25SF161-UUD-T]  64.17,59.58 270 top
U$16  ADXL362  [TFLGA-16/3.3MMX3.1MM]  89.86,53.66 270 bottom
U$17  4P7UFCAPACITOR  [4P7UFCAPACITOR]  82.65,50.28 90 top
U$18  32MHZCRYSTAL  [32MHZCRYSTAL]  85.05,59.85 180 top
U$19  1UFCAPACITOR  [1UFCAPACITOR]  82.27,52.79 0 top
U$20  AT25SF161-UUD-T  [AT25SF161-UUD-T]  88.17,59.58 270 top
U$21  ADXL362  [TFLGA-16/3.3MMX3.1MM]  113.86,53.66 270 bottom
U$22  4P7UFCAPACITOR  [4P7UFCAPACITOR]  106.65,50.28 90 top
U$23  32MHZCRYSTAL  [32MHZCRYSTAL]  109.05,59.85 180 top
U$24  1UFCAPACITOR  [1UFCAPACITOR]  106.27,52.79 0 top
U$25  AT25SF161-UUD-T  [AT25SF161-UUD-T]  112.17,59.58 270 top
U$26  ADXL362  [TFLGA-16/3.3MMX3.1MM]  17.86,33.66 270 bottom
U$27  4P7UFCAPACITOR  [4P7UFCAPACITOR]  10.65,30.28 90 top
U$28  32MHZCRYSTAL  [32MHZCRYSTAL]  13.05,39.85 180 top
U$29  1UFCAPACITOR  [1UFCAPACITOR]  10.27,32.79 0 top
U$30  AT25SF161-UUD-T  [AT25SF161-UUD-T]  16.17,39.58 270 top
U$31  ADXL362  [TFLGA-16/3.3MMX3.1MM]  41.86,33.66 270 bottom
U$32  4P7UFCAPACITOR  [4P7UFCAPACITOR]  34.65,30.28 90 top
U$33  32MHZCRYSTAL  [32MHZCRYSTAL]  37.05,39.85 180 top
U$34  1UFCAPACITOR  [1UFCAPACITOR]  34.27,32.79 0 top
U$35  AT25SF161-UUD-T  [AT25SF161-UUD-T]  40.17,39.58 270 top
U$36  ADXL362  [TFLGA-16/3.3MMX3.1MM]  65.86,33.66 270 bottom
U$37  4P7UFCAPACITOR  [4P7UFCAPACITOR]  58.65,30.28 90 top
U$38  32MHZCRYSTAL  [32MHZCRYSTAL]  61.05,39.85 180 top
U$39  1UFCAPACITOR  [1UFCAPACITOR]  58.27,32.79 0 top
U$40  AT25SF161-UUD-T  [AT25SF161-UUD-T]  64.17,39.58 270 top
U$41  ADXL362  [TFLGA-16/3.3MMX3.1MM]  89.86,33.66 270 bottom
U$42  4P7UFCAPACITOR  [4P7UFCAPACITOR]  82.65,30.28 90 top
U$43  32MHZCRYSTAL  [32MHZCRYSTAL]  85.05,39.85 180 top
U$44  1UFCAPACITOR  [1UFCAPACITOR]  82.27,32.79 0 top
U$45  AT25SF161-UUD-T  [AT25SF161-UUD-T]  88.17,39.58 270 top
U$46  ADXL362  [TFLGA-16/3.3MMX3.1MM]  113.86,33.66 270 bottom
U$47  4P7UFCAPACITOR  [4P7UFCAPACITOR]  106.65,30.28 90 top
U$48  32MHZCRYSTAL  [32MHZCRYSTAL]  109.05,39.85 180 top
U$49  1UFCAPACITOR  [1UFCAPACITOR]  106.27,32.79 0 top
U$50  AT25SF161-UUD-T  [AT25SF161-UUD-T]  112.17,39.58 270 top
U$51  ADXL362  [TFLGA-16/3.3MMX3.1MM]  113.86,13.66 270 bottom
U$52  4P7UFCAPACITOR  [4P7UFCAPACITOR]  106.65,10.28 90 top
U$53  32MHZCRYSTAL  [32MHZCRYSTAL]  109.05,19.85 180 top
U$54  1UFCAPACITOR  [1UFCAPACITOR]  106.27,12.79 0 top
U$55  AT25SF161-UUD-T  [AT25SF161-UUD-T]  112.17,19.58 270 top
U$56  ADXL362  [TFLGA-16/3.3MMX3.1MM]  89.86,13.66 270 bottom
U$57  4P7UFCAPACITOR  [4P7UFCAPACITOR]  82.65,10.28 90 top
U$58  32MHZCRYSTAL  [32MHZCRYSTAL]  85.05,19.85 180 top
U$59  1UFCAPACITOR  [1UFCAPACITOR]  82.27,12.79 0 top
U$60  AT25SF161-UUD-T  [AT25SF161-UUD-T]  88.17,19.58 270 top
U$61  ADXL362  [TFLGA-16/3.3MMX3.1MM]  65.86,13.66 270 bottom
U$62  4P7UFCAPACITOR  [4P7UFCAPACITOR]  58.65,10.28 90 top
U$63  32MHZCRYSTAL  [32MHZCRYSTAL]  61.05,19.85 180 top
U$64  1UFCAPACITOR  [1UFCAPACITOR]  58.27,12.79 0 top
U$65  AT25SF161-UUD-T  [AT25SF161-UUD-T]  64.17,19.58 270 top
U$66  ADXL362  [TFLGA-16/3.3MMX3.1MM]  41.86,13.66 270 bottom
U$67  4P7UFCAPACITOR  [4P7UFCAPACITOR]  34.65,10.28 90 top
U$68  32MHZCRYSTAL  [32MHZCRYSTAL]  37.05,19.85 180 top
U$69  1UFCAPACITOR  [1UFCAPACITOR]  34.27,12.79 0 top
U$70  AT25SF161-UUD-T  [AT25SF161-UUD-T]  40.17,19.58 270 top
U$71  ADXL362  [TFLGA-16/3.3MMX3.1MM]  17.86,13.66 270 bottom
U$72  4P7UFCAPACITOR  [4P7UFCAPACITOR]  10.65,10.28 90 top
U$73  32MHZCRYSTAL  [32MHZCRYSTAL]  13.05,19.85 180 top
U$74  1UFCAPACITOR  [1UFCAPACITOR]  10.27,12.79 0 top
U$75  AT25SF161-UUD-T  [AT25SF161-UUD-T]  16.17,19.58 270 top
U$76  ADXL362  [TFLGA-16/3.3MMX3.1MM]  17.86,74.66 270 bottom
U$77  4P7UFCAPACITOR  [4P7UFCAPACITOR]  10.65,71.28 90 top
U$78  32MHZCRYSTAL  [32MHZCRYSTAL]  13.05,80.85 180 top
U$79  1UFCAPACITOR  [1UFCAPACITOR]  10.27,73.79 0 top
U$80  AT25SF161-UUD-T  [AT25SF161-UUD-T]  16.17,80.58 270 top
U$81  ADXL362  [TFLGA-16/3.3MMX3.1MM]  41.86,74.66 270 bottom
U$82  4P7UFCAPACITOR  [4P7UFCAPACITOR]  34.65,71.28 90 top
U$83  32MHZCRYSTAL  [32MHZCRYSTAL]  37.05,80.85 180 top
U$84  1UFCAPACITOR  [1UFCAPACITOR]  34.27,73.79 0 top
U$85  AT25SF161-UUD-T  [AT25SF161-UUD-T]  40.17,80.58 270 top
U$86  ADXL362  [TFLGA-16/3.3MMX3.1MM]  65.86,74.66 270 bottom
U$87  4P7UFCAPACITOR  [4P7UFCAPACITOR]  58.65,71.28 90 top
U$88  32MHZCRYSTAL  [32MHZCRYSTAL]  61.05,80.85 180 top
U$89  1UFCAPACITOR  [1UFCAPACITOR]  58.27,73.79 0 top
U$90  AT25SF161-UUD-T  [AT25SF161-UUD-T]  64.17,80.58 270 top
U$91  ADXL362  [TFLGA-16/3.3MMX3.1MM]  89.86,74.66 270 bottom
U$92  4P7UFCAPACITOR  [4P7UFCAPACITOR]  82.65,71.28 90 top
U$93  32MHZCRYSTAL  [32MHZCRYSTAL]  85.05,80.85 180 top
U$94  1UFCAPACITOR  [1UFCAPACITOR]  82.27,73.79 0 top
U$95  AT25SF161-UUD-T  [AT25SF161-UUD-T]  88.17,80.58 270 top
U$96  ADXL362  [TFLGA-16/3.3MMX3.1MM]  113.86,74.66 270 bottom
U$97  4P7UFCAPACITOR  [4P7UFCAPACITOR]  106.65,71.28 90 top
U$98  32MHZCRYSTAL  [32MHZCRYSTAL]  109.05,80.85 180 top
U$99  1UFCAPACITOR  [1UFCAPACITOR]  106.27,73.79 0 top
U$100  AT25SF161-UUD-T  [AT25SF161-UUD-T]  112.17,80.58 270 top
U$101  ADXL362  [TFLGA-16/3.3MMX3.1MM]  17.86,94.66 270 bottom
U$102  4P7UFCAPACITOR  [4P7UFCAPACITOR]  10.65,91.28 90 top
U$103  32MHZCRYSTAL  [32MHZCRYSTAL]  13.05,100.85 180 top
U$104  1UFCAPACITOR  [1UFCAPACITOR]  10.27,93.79 0 top
U$105  AT25SF161-UUD-T  [AT25SF161-UUD-T]  16.17,100.58 270 top
U$106  ADXL362  [TFLGA-16/3.3MMX3.1MM]  41.86,94.66 270 bottom
U$107  4P7UFCAPACITOR  [4P7UFCAPACITOR]  34.65,91.28 90 top
U$108  32MHZCRYSTAL  [32MHZCRYSTAL]  37.05,100.85 180 top
U$109  1UFCAPACITOR  [1UFCAPACITOR]  34.27,93.79 0 top
U$110  AT25SF161-UUD-T  [AT25SF161-UUD-T]  40.17,100.58 270 top
U$111  ADXL362  [TFLGA-16/3.3MMX3.1MM]  65.86,94.66 270 bottom
U$112  4P7UFCAPACITOR  [4P7UFCAPACITOR]  58.65,91.28 90 top
U$113  32MHZCRYSTAL  [32MHZCRYSTAL]  61.05,100.85 180 top
U$114  1UFCAPACITOR  [1UFCAPACITOR]  58.27,93.79 0 top
U$115  AT25SF161-UUD-T  [AT25SF161-UUD-T]  64.17,100.58 270 top
U$116  ADXL362  [TFLGA-16/3.3MMX3.1MM]  89.86,94.66 270 bottom
U$117  4P7UFCAPACITOR  [4P7UFCAPACITOR]  82.65,91.28 90 top
U$118  32MHZCRYSTAL  [32MHZCRYSTAL]  85.05,100.85 180 top
U$119  1UFCAPACITOR  [1UFCAPACITOR]  82.27,93.79 0 top
U$120  AT25SF161-UUD-T  [AT25SF161-UUD-T]  88.17,100.58 270 top
U$121  ADXL362  [TFLGA-16/3.3MMX3.1MM]  113.86,94.66 270 bottom
U$122  4P7UFCAPACITOR  [4P7UFCAPACITOR]  106.65,91.28 90 top
U$123  32MHZCRYSTAL  [32MHZCRYSTAL]  109.05,100.85 180 top
U$124  1UFCAPACITOR  [1UFCAPACITOR]  106.27,93.79 0 top
U$125  AT25SF161-UUD-T  [AT25SF161-UUD-T]  112.17,100.58 270 top

## Library data of the parts
C1-C4 C8-C11 C15-C18 C22-C25 C29-C32 C36-C39 C43-C46 C50-C53 C57-C60 C64-C67 C71-C74 C78-C81 C85-C88 C92-C95 C99-C102 C106-C109 C113-C116 C120-C123 C127-C130 C134-C137 C141-C144 C148-C151 C155-C158 C162-C165 C169-C172 = 0p1_uF_capacitor; MANUFACTURER_PART_NUMBER: C0402C0G1C101J020BC; VENDOR: TDK
C5 C12 C19 C26 C33 C40 C47 C54 C61 C68 C75 C82 C89 C96 C103 C110 C117 C124 C131 C138 C145 C152 C159 C166 C173 = 100_pF_capacitor; MANUFACTURER_PART_NUMBER: C0402C0G1C101J020BC; VENDOR: TDK
C6 C7 C13 C14 C20 C21 C27 C28 C34 C35 C41 C42 C48 C49 C55 C56 C62 C63 C69 C70 C76 C77 C83 C84 C90 C91 C97 C98 C104 C105 C111 C112 C118 C119 C125 C126 C132 C133 C139 C140 C146 C147 C153 C154 C160 C161 C167 C168 C174 C175 = 6pf_capacitor_new-bigger; DESCRIPTION: 0402 6 pF 50 V ±0.25 pF Tolerance C0G SMT Multilayer Ceramic Capacitor; DIGI-KEY_PART_NUMBER: 490-8222-1-ND; DIGI-KEY_PURCHASE_URL: https://www.digikey.com/product-detail/en/murata-electronics-north-america/GRM1555C1H6R0CA01D/490-8222-1-ND/4380516?WT.z_cid=ref_snapeda&utm_source=snapeda&utm_medium=aggregator&utm_campaign=buynow; MF: Murata; MP: GRM1555C1H6R0CA01D; PACKAGE: 0402 Murata
J1-J25 = SparkFun-Connectors
U1-U25 = nrf52832-breakout-temp; PROD_ID: IC-13460
U$1 U$4 U$11 U$16 U$21 U$26 U$31 U$36 U$41 U$46 U$51 U$56 U$61 U$66 U$71 U$76 U$81 U$86 U$91 U$96 U$101 U$106 U$111 U$116 U$121 = ADXL362
U$2 U$5 U$12 U$17 U$22 U$27 U$32 U$37 U$42 U$47 U$52 U$57 U$62 U$67 U$72 U$77 U$82 U$87 U$92 U$97 U$102 U$107 U$112 U$117 U$122 = 4p7_uF_capacitor
U$3 U$10 U$15 U$20 U$25 U$30 U$35 U$40 U$45 U$50 U$55 U$60 U$65 U$70 U$75 U$80 U$85 U$90 U$95 U$100 U$105 U$110 U$115 U$120 U$125 = AT25SF161-UUD-T
U$6 U$8 U$13 U$18 U$23 U$28 U$33 U$38 U$43 U$48 U$53 U$58 U$63 U$68 U$73 U$78 U$83 U$88 U$93 U$98 U$103 U$108 U$113 U$118 U$123 = 32_mhz_crystal
U$7 U$9 U$14 U$19 U$24 U$29 U$34 U$39 U$44 U$49 U$54 U$59 U$64 U$69 U$74 U$79 U$84 U$89 U$94 U$99 U$104 U$109 U$114 U$119 U$124 = 1_uF_capacitor

## Nets
ADXL_POWER-QFAA: C1.2 U1.10 U$1.VDD/IO U$1.VS
ADXL_POWER-QFAA1: C8.2 U2.10 U$4.VDD/IO U$4.VS
ADXL_POWER-QFAA2: C15.2 U3.10 U$11.VDD/IO U$11.VS
ADXL_POWER-QFAA3: C22.2 U4.10 U$16.VDD/IO U$16.VS
ADXL_POWER-QFAA4: C29.2 U5.10 U$21.VDD/IO U$21.VS
ADXL_POWER-QFAA5: C36.2 U6.10 U$26.VDD/IO U$26.VS
ADXL_POWER-QFAA6: C43.2 U7.10 U$31.VDD/IO U$31.VS
ADXL_POWER-QFAA7: C50.2 U8.10 U$36.VDD/IO U$36.VS
ADXL_POWER-QFAA8: C57.2 U9.10 U$41.VDD/IO U$41.VS
ADXL_POWER-QFAA9: C64.2 U10.10 U$46.VDD/IO U$46.VS
ADXL_POWER-QFAA10: C71.2 U11.10 U$51.VDD/IO U$51.VS
ADXL_POWER-QFAA11: C78.2 U12.10 U$56.VDD/IO U$56.VS
ADXL_POWER-QFAA12: C85.2 U13.10 U$61.VDD/IO U$61.VS
ADXL_POWER-QFAA13: C92.2 U14.10 U$66.VDD/IO U$66.VS
ADXL_POWER-QFAA14: C99.2 U15.10 U$71.VDD/IO U$71.VS
ADXL_POWER-QFAA15: C106.2 U16.10 U$76.VDD/IO U$76.VS
ADXL_POWER-QFAA16: C113.2 U17.10 U$81.VDD/IO U$81.VS
ADXL_POWER-QFAA17: C120.2 U18.10 U$86.VDD/IO U$86.VS
ADXL_POWER-QFAA18: C127.2 U19.10 U$91.VDD/IO U$91.VS
ADXL_POWER-QFAA19: C134.2 U20.10 U$96.VDD/IO U$96.VS
ADXL_POWER-QFAA20: C141.2 U21.10 U$101.VDD/IO U$101.VS
ADXL_POWER-QFAA21: C148.2 U22.10 U$106.VDD/IO U$106.VS
ADXL_POWER-QFAA22: C155.2 U23.10 U$111.VDD/IO U$111.VS
ADXL_POWER-QFAA23: C162.2 U24.10 U$116.VDD/IO U$116.VS
ADXL_POWER-QFAA24: C169.2 U25.10 U$121.VDD/IO U$121.VS
ANT-QFAA: U1.30
ANT-QFAA1: U2.30
ANT-QFAA2: U3.30
ANT-QFAA3: U4.30
ANT-QFAA4: U5.30
ANT-QFAA5: U6.30
ANT-QFAA6: U7.30
ANT-QFAA7: U8.30
ANT-QFAA8: U9.30
ANT-QFAA9: U10.30
ANT-QFAA10: U11.30
ANT-QFAA11: U12.30
ANT-QFAA12: U13.30
ANT-QFAA13: U14.30
ANT-QFAA14: U15.30
ANT-QFAA15: U16.30
ANT-QFAA16: U17.30
ANT-QFAA17: U18.30
ANT-QFAA18: U19.30
ANT-QFAA19: U20.30
ANT-QFAA20: U21.30
ANT-QFAA21: U22.30
ANT-QFAA22: U23.30
ANT-QFAA23: U24.30
ANT-QFAA24: U25.30
CS-QFAA: U1.21 U$1.CS
CS-QFAA1: U2.21 U$4.CS
CS-QFAA2: U3.21 U$11.CS
CS-QFAA3: U4.21 U$16.CS
CS-QFAA4: U5.21 U$21.CS
CS-QFAA5: U6.21 U$26.CS
CS-QFAA6: U7.21 U$31.CS
CS-QFAA7: U8.21 U$36.CS
CS-QFAA8: U9.21 U$41.CS
CS-QFAA9: U10.21 U$46.CS
CS-QFAA10: U11.21 U$51.CS
CS-QFAA11: U12.21 U$56.CS
CS-QFAA12: U13.21 U$61.CS
CS-QFAA13: U14.21 U$66.CS
CS-QFAA14: U15.21 U$71.CS
CS-QFAA15: U16.21 U$76.CS
CS-QFAA16: U17.21 U$81.CS
CS-QFAA17: U18.21 U$86.CS
CS-QFAA18: U19.21 U$91.CS
CS-QFAA19: U20.21 U$96.CS
CS-QFAA20: U21.21 U$101.CS
CS-QFAA21: U22.21 U$106.CS
CS-QFAA22: U23.21 U$111.CS
CS-QFAA23: U24.21 U$116.CS
CS-QFAA24: U25.21 U$121.CS
CS_FLASH: U1.23 U$3.5
CS_FLASH1: U2.23 U$10.5
CS_FLASH2: U3.23 U$15.5
CS_FLASH3: U4.23 U$20.5
CS_FLASH4: U5.23 U$25.5
CS_FLASH5: U6.23 U$30.5
CS_FLASH6: U7.23 U$35.5
CS_FLASH7: U8.23 U$40.5
CS_FLASH8: U9.23 U$45.5
CS_FLASH9: U10.23 U$50.5
CS_FLASH10: U11.23 U$55.5
CS_FLASH11: U12.23 U$60.5
CS_FLASH12: U13.23 U$65.5
CS_FLASH13: U14.23 U$70.5
CS_FLASH14: U15.23 U$75.5
CS_FLASH15: U16.23 U$80.5
CS_FLASH16: U17.23 U$85.5
CS_FLASH17: U18.23 U$90.5
CS_FLASH18: U19.23 U$95.5
CS_FLASH19: U20.23 U$100.5
CS_FLASH20: U21.23 U$105.5
CS_FLASH21: U22.23 U$110.5
CS_FLASH22: U23.23 U$115.5
CS_FLASH23: U24.23 U$120.5
CS_FLASH24: U25.23 U$125.5
DEC1-QFAA: C2.1 U1.1
DEC1-QFAA1: C9.1 U2.1
DEC1-QFAA2: C16.1 U3.1
DEC1-QFAA3: C23.1 U4.1
DEC1-QFAA4: C30.1 U5.1
DEC1-QFAA5: C37.1 U6.1
DEC1-QFAA6: C44.1 U7.1
DEC1-QFAA7: C51.1 U8.1
DEC1-QFAA8: C58.1 U9.1
DEC1-QFAA9: C65.1 U10.1
DEC1-QFAA10: C72.1 U11.1
DEC1-QFAA11: C79.1 U12.1
DEC1-QFAA12: C86.1 U13.1
DEC1-QFAA13: C93.1 U14.1
DEC1-QFAA14: C100.1 U15.1
DEC1-QFAA15: C107.1 U16.1
DEC1-QFAA16: C114.1 U17.1
DEC1-QFAA17: C121.1 U18.1
DEC1-QFAA18: C128.1 U19.1
DEC1-QFAA19: C135.1 U20.1
DEC1-QFAA20: C142.1 U21.1
DEC1-QFAA21: C149.1 U22.1
DEC1-QFAA22: C156.1 U23.1
DEC1-QFAA23: C163.1 U24.1
DEC1-QFAA24: C170.1 U25.1
DEC3-QFAA: C5.1 U1.33
DEC3-QFAA1: C12.1 U2.33
DEC3-QFAA2: C19.1 U3.33
DEC3-QFAA3: C26.1 U4.33
DEC3-QFAA4: C33.1 U5.33
DEC3-QFAA5: C40.1 U6.33
DEC3-QFAA6: C47.1 U7.33
DEC3-QFAA7: C54.1 U8.33
DEC3-QFAA8: C61.1 U9.33
DEC3-QFAA9: C68.1 U10.33
DEC3-QFAA10: C75.1 U11.33
DEC3-QFAA11: C82.1 U12.33
DEC3-QFAA12: C89.1 U13.33
DEC3-QFAA13: C96.1 U14.33
DEC3-QFAA14: C103.1 U15.33
DEC3-QFAA15: C110.1 U16.33
DEC3-QFAA16: C117.1 U17.33
DEC3-QFAA17: C124.1 U18.33
DEC3-QFAA18: C131.1 U19.33
DEC3-QFAA19: C138.1 U20.33
DEC3-QFAA20: C145.1 U21.33
DEC3-QFAA21: C152.1 U22.33
DEC3-QFAA22: C159.1 U23.33
DEC3-QFAA23: C166.1 U24.33
DEC3-QFAA24: C173.1 U25.33
DEC4-QFAA: U1.46 U$7.P$4
DEC4-QFAA1: U2.46 U$9.P$4
DEC4-QFAA2: U3.46 U$14.P$4
DEC4-QFAA3: U4.46 U$19.P$4
DEC4-QFAA4: U5.46 U$24.P$4
DEC4-QFAA5: U6.46 U$29.P$4
DEC4-QFAA6: U7.46 U$34.P$4
DEC4-QFAA7: U8.46 U$39.P$4
DEC4-QFAA8: U9.46 U$44.P$4
DEC4-QFAA9: U10.46 U$49.P$4
DEC4-QFAA10: U11.46 U$54.P$4
DEC4-QFAA11: U12.46 U$59.P$4
DEC4-QFAA12: U13.46 U$64.P$4
DEC4-QFAA13: U14.46 U$69.P$4
DEC4-QFAA14: U15.46 U$74.P$4
DEC4-QFAA15: U16.46 U$79.P$4
DEC4-QFAA16: U17.46 U$84.P$4
DEC4-QFAA17: U18.46 U$89.P$4
DEC4-QFAA18: U19.46 U$94.P$4
DEC4-QFAA19: U20.46 U$99.P$4
DEC4-QFAA20: U21.46 U$104.P$4
DEC4-QFAA21: U22.46 U$109.P$4
DEC4-QFAA22: U23.46 U$114.P$4
DEC4-QFAA23: U24.46 U$119.P$4
DEC4-QFAA24: U25.46 U$124.P$4
FLASH_POWER: U1.22 U$3.1
FLASH_POWER1: U2.22 U$10.1
FLASH_POWER2: U3.22 U$15.1
FLASH_POWER3: U4.22 U$20.1
FLASH_POWER4: U5.22 U$25.1
FLASH_POWER5: U6.22 U$30.1
FLASH_POWER6: U7.22 U$35.1
FLASH_POWER7: U8.22 U$40.1
FLASH_POWER8: U9.22 U$45.1
FLASH_POWER9: U10.22 U$50.1
FLASH_POWER10: U11.22 U$55.1
FLASH_POWER11: U12.22 U$60.1
FLASH_POWER12: U13.22 U$65.1
FLASH_POWER13: U14.22 U$70.1
FLASH_POWER14: U15.22 U$75.1
FLASH_POWER15: U16.22 U$80.1
FLASH_POWER16: U17.22 U$85.1
FLASH_POWER17: U18.22 U$90.1
FLASH_POWER18: U19.22 U$95.1
FLASH_POWER19: U20.22 U$100.1
FLASH_POWER20: U21.22 U$105.1
FLASH_POWER21: U22.22 U$110.1
FLASH_POWER22: U23.22 U$115.1
FLASH_POWER23: U24.22 U$120.1
FLASH_POWER24: U25.22 U$125.1
GND: C1.1 C2.2 C3.1 C4.1 C5.2 C6.1 C7.1 J2.4 U1.31 U1.45 U1.EP U$1.GND@1 U$1.GND@2 U$1.GND@3 U$2.P$4 U$3.8 U$7.P$3
GND1: C8.1 C9.2 C10.1 C11.1 C12.2 C13.1 C14.1 J1.4 U2.31 U2.45 U2.EP U$4.GND@1 U$4.GND@2 U$4.GND@3 U$5.P$4 U$9.P$3 U$10.8
GND2: C15.1 C16.2 C17.1 C18.1 C19.2 C20.1 C21.1 J3.4 U3.31 U3.45 U3.EP U$11.GND@1 U$11.GND@2 U$11.GND@3 U$12.P$4 U$14.P$3 U$15.8
GND3: C22.1 C23.2 C24.1 C25.1 C26.2 C27.1 C28.1 J4.4 U4.31 U4.45 U4.EP U$16.GND@1 U$16.GND@2 U$16.GND@3 U$17.P$4 U$19.P$3 U$20.8
GND4: C29.1 C30.2 C31.1 C32.1 C33.2 C34.1 C35.1 J5.4 U5.31 U5.45 U5.EP U$21.GND@1 U$21.GND@2 U$21.GND@3 U$22.P$4 U$24.P$3 U$25.8
GND5: C36.1 C37.2 C38.1 C39.1 C40.2 C41.1 C42.1 J6.4 U6.31 U6.45 U6.EP U$26.GND@1 U$26.GND@2 U$26.GND@3 U$27.P$4 U$29.P$3 U$30.8
GND6: C43.1 C44.2 C45.1 C46.1 C47.2 C48.1 C49.1 J7.4 U7.31 U7.45 U7.EP U$31.GND@1 U$31.GND@2 U$31.GND@3 U$32.P$4 U$34.P$3 U$35.8
GND7: C50.1 C51.2 C52.1 C53.1 C54.2 C55.1 C56.1 J8.4 U8.31 U8.45 U8.EP U$36.GND@1 U$36.GND@2 U$36.GND@3 U$37.P$4 U$39.P$3 U$40.8
GND8: C57.1 C58.2 C59.1 C60.1 C61.2 C62.1 C63.1 J9.4 U9.31 U9.45 U9.EP U$41.GND@1 U$41.GND@2 U$41.GND@3 U$42.P$4 U$44.P$3 U$45.8
GND9: C64.1 C65.2 C66.1 C67.1 C68.2 C69.1 C70.1 J10.4 U10.31 U10.45 U10.EP U$46.GND@1 U$46.GND@2 U$46.GND@3 U$47.P$4 U$49.P$3 U$50.8
GND10: C71.1 C72.2 C73.1 C74.1 C75.2 C76.1 C77.1 J11.4 U11.31 U11.45 U11.EP U$51.GND@1 U$51.GND@2 U$51.GND@3 U$52.P$4 U$54.P$3 U$55.8
GND11: C78.1 C79.2 C80.1 C81.1 C82.2 C83.1 C84.1 J12.4 U12.31 U12.45 U12.EP U$56.GND@1 U$56.GND@2 U$56.GND@3 U$57.P$4 U$59.P$3 U$60.8
GND12: C85.1 C86.2 C87.1 C88.1 C89.2 C90.1 C91.1 J13.4 U13.31 U13.45 U13.EP U$61.GND@1 U$61.GND@2 U$61.GND@3 U$62.P$4 U$64.P$3 U$65.8
GND13: C92.1 C93.2 C94.1 C95.1 C96.2 C97.1 C98.1 J14.4 U14.31 U14.45 U14.EP U$66.GND@1 U$66.GND@2 U$66.GND@3 U$67.P$4 U$69.P$3 U$70.8
GND14: C99.1 C100.2 C101.1 C102.1 C103.2 C104.1 C105.1 J15.4 U15.31 U15.45 U15.EP U$71.GND@1 U$71.GND@2 U$71.GND@3 U$72.P$4 U$74.P$3 U$75.8
GND15: C106.1 C107.2 C108.1 C109.1 C110.2 C111.1 C112.1 J16.4 U16.31 U16.45 U16.EP U$76.GND@1 U$76.GND@2 U$76.GND@3 U$77.P$4 U$79.P$3 U$80.8
GND16: C113.1 C114.2 C115.1 C116.1 C117.2 C118.1 C119.1 J17.4 U17.31 U17.45 U17.EP U$81.GND@1 U$81.GND@2 U$81.GND@3 U$82.P$4 U$84.P$3 U$85.8
GND17: C120.1 C121.2 C122.1 C123.1 C124.2 C125.1 C126.1 J18.4 U18.31 U18.45 U18.EP U$86.GND@1 U$86.GND@2 U$86.GND@3 U$87.P$4 U$89.P$3 U$90.8
GND18: C127.1 C128.2 C129.1 C130.1 C131.2 C132.1 C133.1 J19.4 U19.31 U19.45 U19.EP U$91.GND@1 U$91.GND@2 U$91.GND@3 U$92.P$4 U$94.P$3 U$95.8
GND19: C134.1 C135.2 C136.1 C137.1 C138.2 C139.1 C140.1 J20.4 U20.31 U20.45 U20.EP U$96.GND@1 U$96.GND@2 U$96.GND@3 U$97.P$4 U$99.P$3 U$100.8
GND20: C141.1 C142.2 C143.1 C144.1 C145.2 C146.1 C147.1 J21.4 U21.31 U21.45 U21.EP U$101.GND@1 U$101.GND@2 U$101.GND@3 U$102.P$4 U$104.P$3 U$105.8
GND21: C148.1 C149.2 C150.1 C151.1 C152.2 C153.1 C154.1 J22.4 U22.31 U22.45 U22.EP U$106.GND@1 U$106.GND@2 U$106.GND@3 U$107.P$4 U$109.P$3 U$110.8
GND22: C155.1 C156.2 C157.1 C158.1 C159.2 C160.1 C161.1 J23.4 U23.31 U23.45 U23.EP U$111.GND@1 U$111.GND@2 U$111.GND@3 U$112.P$4 U$114.P$3 U$115.8
GND23: C162.1 C163.2 C164.1 C165.1 C166.2 C167.1 C168.1 J24.4 U24.31 U24.45 U24.EP U$116.GND@1 U$116.GND@2 U$116.GND@3 U$117.P$4 U$119.P$3 U$120.8
GND24: C169.1 C170.2 C171.1 C172.1 C173.2 C174.1 C175.1 J25.4 U25.31 U25.45 U25.EP U$121.GND@1 U$121.GND@2 U$121.GND@3 U$122.P$4 U$124.P$3 U$125.8
HOLD_FLASH: U1.27 U$3.2
HOLD_FLASH1: U2.27 U$10.2
HOLD_FLASH2: U3.27 U$15.2
HOLD_FLASH3: U4.27 U$20.2
HOLD_FLASH4: U5.27 U$25.2
HOLD_FLASH5: U6.27 U$30.2
HOLD_FLASH6: U7.27 U$35.2
HOLD_FLASH7: U8.27 U$40.2
HOLD_FLASH8: U9.27 U$45.2
HOLD_FLASH9: U10.27 U$50.2
HOLD_FLASH10: U11.27 U$55.2
HOLD_FLASH11: U12.27 U$60.2
HOLD_FLASH12: U13.27 U$65.2
HOLD_FLASH13: U14.27 U$70.2
HOLD_FLASH14: U15.27 U$75.2
HOLD_FLASH15: U16.27 U$80.2
HOLD_FLASH16: U17.27 U$85.2
HOLD_FLASH17: U18.27 U$90.2
HOLD_FLASH18: U19.27 U$95.2
HOLD_FLASH19: U20.27 U$100.2
HOLD_FLASH20: U21.27 U$105.2
HOLD_FLASH21: U22.27 U$110.2
HOLD_FLASH22: U23.27 U$115.2
HOLD_FLASH23: U24.27 U$120.2
HOLD_FLASH24: U25.27 U$125.2
MISO-QFAA: U1.17 U$1.MISO
MISO-QFAA1: U2.17 U$4.MISO
MISO-QFAA2: U3.17 U$11.MISO
MISO-QFAA3: U4.17 U$16.MISO
MISO-QFAA4: U5.17 U$21.MISO
MISO-QFAA5: U6.17 U$26.MISO
MISO-QFAA6: U7.17 U$31.MISO
MISO-QFAA7: U8.17 U$36.MISO
MISO-QFAA8: U9.17 U$41.MISO
MISO-QFAA9: U10.17 U$46.MISO
MISO-QFAA10: U11.17 U$51.MISO
MISO-QFAA11: U12.17 U$56.MISO
MISO-QFAA12: U13.17 U$61.MISO
MISO-QFAA13: U14.17 U$66.MISO
MISO-QFAA14: U15.17 U$71.MISO
MISO-QFAA15: U16.17 U$76.MISO
MISO-QFAA16: U17.17 U$81.MISO
MISO-QFAA17: U18.17 U$86.MISO
MISO-QFAA18: U19.17 U$91.MISO
MISO-QFAA19: U20.17 U$96.MISO
MISO-QFAA20: U21.17 U$101.MISO
MISO-QFAA21: U22.17 U$106.MISO
MISO-QFAA22: U23.17 U$111.MISO
MISO-QFAA23: U24.17 U$116.MISO
MISO-QFAA24: U25.17 U$121.MISO
MOSI-QFAA: U1.18 U$1.MOSI
MOSI-QFAA1: U2.18 U$4.MOSI
MOSI-QFAA2: U3.18 U$11.MOSI
MOSI-QFAA3: U4.18 U$16.MOSI
MOSI-QFAA4: U5.18 U$21.MOSI
MOSI-QFAA5: U6.18 U$26.MOSI
MOSI-QFAA6: U7.18 U$31.MOSI
MOSI-QFAA7: U8.18 U$36.MOSI
MOSI-QFAA8: U9.18 U$41.MOSI
MOSI-QFAA9: U10.18 U$46.MOSI
MOSI-QFAA10: U11.18 U$51.MOSI
MOSI-QFAA11: U12.18 U$56.MOSI
MOSI-QFAA12: U13.18 U$61.MOSI
MOSI-QFAA13: U14.18 U$66.MOSI
MOSI-QFAA14: U15.18 U$71.MOSI
MOSI-QFAA15: U16.18 U$76.MOSI
MOSI-QFAA16: U17.18 U$81.MOSI
MOSI-QFAA17: U18.18 U$86.MOSI
MOSI-QFAA18: U19.18 U$91.MOSI
MOSI-QFAA19: U20.18 U$96.MOSI
MOSI-QFAA20: U21.18 U$101.MOSI
MOSI-QFAA21: U22.18 U$106.MOSI
MOSI-QFAA22: U23.18 U$111.MOSI
MOSI-QFAA23: U24.18 U$116.MOSI
MOSI-QFAA24: U25.18 U$121.MOSI
P0.06-QFAA: J2.6 U1.8
P0.06-QFAA1: J1.6 U2.8
P0.06-QFAA2: J3.6 U3.8
P0.06-QFAA3: J4.6 U4.8
P0.06-QFAA4: J5.6 U5.8
P0.06-QFAA5: J6.6 U6.8
P0.06-QFAA6: J7.6 U7.8
P0.06-QFAA7: J8.6 U8.8
P0.06-QFAA8: J9.6 U9.8
P0.06-QFAA9: J10.6 U10.8
P0.06-QFAA10: J11.6 U11.8
P0.06-QFAA11: J12.6 U12.8
P0.06-QFAA12: J13.6 U13.8
P0.06-QFAA13: J14.6 U14.8
P0.06-QFAA14: J15.6 U15.8
P0.06-QFAA15: J16.6 U16.8
P0.06-QFAA16: J17.6 U17.8
P0.06-QFAA17: J18.6 U18.8
P0.06-QFAA18: J19.6 U19.8
P0.06-QFAA19: J20.6 U20.8
P0.06-QFAA20: J21.6 U21.8
P0.06-QFAA21: J22.6 U22.8
P0.06-QFAA22: J23.6 U23.8
P0.06-QFAA23: J24.6 U24.8
P0.06-QFAA24: J25.6 U25.8
P0.12-QFAA: J2.7 U1.15
P0.12-QFAA1: J1.7 U2.15
P0.12-QFAA2: J3.7 U3.15
P0.12-QFAA3: J4.7 U4.15
P0.12-QFAA4: J5.7 U5.15
P0.12-QFAA5: J6.7 U6.15
P0.12-QFAA6: J7.7 U7.15
P0.12-QFAA7: J8.7 U8.15
P0.12-QFAA8: J9.7 U9.15
P0.12-QFAA9: J10.7 U10.15
P0.12-QFAA10: J11.7 U11.15
P0.12-QFAA11: J12.7 U12.15
P0.12-QFAA12: J13.7 U13.15
P0.12-QFAA13: J14.7 U14.15
P0.12-QFAA14: J15.7 U15.15
P0.12-QFAA15: J16.7 U16.15
P0.12-QFAA16: J17.7 U17.15
P0.12-QFAA17: J18.7 U18.15
P0.12-QFAA18: J19.7 U19.15
P0.12-QFAA19: J20.7 U20.15
P0.12-QFAA20: J21.7 U21.15
P0.12-QFAA21: J22.7 U22.15
P0.12-QFAA22: J23.7 U23.15
P0.12-QFAA23: J24.7 U24.15
P0.12-QFAA24: J25.7 U25.15
RESET-QFAA: J2.5 U1.24
RESET-QFAA1: J1.5 U2.24
RESET-QFAA2: J3.5 U3.24
RESET-QFAA3: J4.5 U4.24
RESET-QFAA4: J5.5 U5.24
RESET-QFAA5: J6.5 U6.24
RESET-QFAA6: J7.5 U7.24
RESET-QFAA7: J8.5 U8.24
RESET-QFAA8: J9.5 U9.24
RESET-QFAA9: J10.5 U10.24
RESET-QFAA10: J11.5 U11.24
RESET-QFAA11: J12.5 U12.24
RESET-QFAA12: J13.5 U13.24
RESET-QFAA13: J14.5 U14.24
RESET-QFAA14: J15.5 U15.24
RESET-QFAA15: J16.5 U16.24
RESET-QFAA16: J17.5 U17.24
RESET-QFAA17: J18.5 U18.24
RESET-QFAA18: J19.5 U19.24
RESET-QFAA19: J20.5 U20.24
RESET-QFAA20: J21.5 U21.24
RESET-QFAA21: J22.5 U22.24
RESET-QFAA22: J23.5 U23.24
RESET-QFAA23: J24.5 U24.24
RESET-QFAA24: J25.5 U25.24
SCK_FLASH: U1.28 U$3.3
SCK_FLASH1: U2.28 U$10.3
SCK_FLASH2: U3.28 U$15.3
SCK_FLASH3: U4.28 U$20.3
SCK_FLASH4: U5.28 U$25.3
SCK_FLASH5: U6.28 U$30.3
SCK_FLASH6: U7.28 U$35.3
SCK_FLASH7: U8.28 U$40.3
SCK_FLASH8: U9.28 U$45.3
SCK_FLASH9: U10.28 U$50.3
SCK_FLASH10: U11.28 U$55.3
SCK_FLASH11: U12.28 U$60.3
SCK_FLASH12: U13.28 U$65.3
SCK_FLASH13: U14.28 U$70.3
SCK_FLASH14: U15.28 U$75.3
SCK_FLASH15: U16.28 U$80.3
SCK_FLASH16: U17.28 U$85.3
SCK_FLASH17: U18.28 U$90.3
SCK_FLASH18: U19.28 U$95.3
SCK_FLASH19: U20.28 U$100.3
SCK_FLASH20: U21.28 U$105.3
SCK_FLASH21: U22.28 U$110.3
SCK_FLASH22: U23.28 U$115.3
SCK_FLASH23: U24.28 U$120.3
SCK_FLASH24: U25.28 U$125.3
SCLK-QFAA: U1.19 U$1.SCLK
SCLK-QFAA1: U2.19 U$4.SCLK
SCLK-QFAA2: U3.19 U$11.SCLK
SCLK-QFAA3: U4.19 U$16.SCLK
SCLK-QFAA4: U5.19 U$21.SCLK
SCLK-QFAA5: U6.19 U$26.SCLK
SCLK-QFAA6: U7.19 U$31.SCLK
SCLK-QFAA7: U8.19 U$36.SCLK
SCLK-QFAA8: U9.19 U$41.SCLK
SCLK-QFAA9: U10.19 U$46.SCLK
SCLK-QFAA10: U11.19 U$51.SCLK
SCLK-QFAA11: U12.19 U$56.SCLK
SCLK-QFAA12: U13.19 U$61.SCLK
SCLK-QFAA13: U14.19 U$66.SCLK
SCLK-QFAA14: U15.19 U$71.SCLK
SCLK-QFAA15: U16.19 U$76.SCLK
SCLK-QFAA16: U17.19 U$81.SCLK
SCLK-QFAA17: U18.19 U$86.SCLK
SCLK-QFAA18: U19.19 U$91.SCLK
SCLK-QFAA19: U20.19 U$96.SCLK
SCLK-QFAA20: U21.19 U$101.SCLK
SCLK-QFAA21: U22.19 U$106.SCLK
SCLK-QFAA22: U23.19 U$111.SCLK
SCLK-QFAA23: U24.19 U$116.SCLK
SCLK-QFAA24: U25.19 U$121.SCLK
SI_FLASH: U1.29 U$3.4
SI_FLASH1: U2.29 U$10.4
SI_FLASH2: U3.29 U$15.4
SI_FLASH3: U4.29 U$20.4
SI_FLASH4: U5.29 U$25.4
SI_FLASH5: U6.29 U$30.4
SI_FLASH6: U7.29 U$35.4
SI_FLASH7: U8.29 U$40.4
SI_FLASH8: U9.29 U$45.4
SI_FLASH9: U10.29 U$50.4
SI_FLASH10: U11.29 U$55.4
SI_FLASH11: U12.29 U$60.4
SI_FLASH12: U13.29 U$65.4
SI_FLASH13: U14.29 U$70.4
SI_FLASH14: U15.29 U$75.4
SI_FLASH15: U16.29 U$80.4
SI_FLASH16: U17.29 U$85.4
SI_FLASH17: U18.29 U$90.4
SI_FLASH18: U19.29 U$95.4
SI_FLASH19: U20.29 U$100.4
SI_FLASH20: U21.29 U$105.4
SI_FLASH21: U22.29 U$110.4
SI_FLASH22: U23.29 U$115.4
SI_FLASH23: U24.29 U$120.4
SI_FLASH24: U25.29 U$125.4
SO_FLASH: U1.39 U$3.6
SO_FLASH1: U2.39 U$10.6
SO_FLASH2: U3.39 U$15.6
SO_FLASH3: U4.39 U$20.6
SO_FLASH4: U5.39 U$25.6
SO_FLASH5: U6.39 U$30.6
SO_FLASH6: U7.39 U$35.6
SO_FLASH7: U8.39 U$40.6
SO_FLASH8: U9.39 U$45.6
SO_FLASH9: U10.39 U$50.6
SO_FLASH10: U11.39 U$55.6
SO_FLASH11: U12.39 U$60.6
SO_FLASH12: U13.39 U$65.6
SO_FLASH13: U14.39 U$70.6
SO_FLASH14: U15.39 U$75.6
SO_FLASH15: U16.39 U$80.6
SO_FLASH16: U17.39 U$85.6
SO_FLASH17: U18.39 U$90.6
SO_FLASH18: U19.39 U$95.6
SO_FLASH19: U20.39 U$100.6
SO_FLASH20: U21.39 U$105.6
SO_FLASH21: U22.39 U$110.6
SO_FLASH22: U23.39 U$115.6
SO_FLASH23: U24.39 U$120.6
SO_FLASH24: U25.39 U$125.6
SWDCLK-QFAA: J2.2 U1.25
SWDCLK-QFAA1: J1.2 U2.25
SWDCLK-QFAA2: J3.2 U3.25
SWDCLK-QFAA3: J4.2 U4.25
SWDCLK-QFAA4: J5.2 U5.25
SWDCLK-QFAA5: J6.2 U6.25
SWDCLK-QFAA6: J7.2 U7.25
SWDCLK-QFAA7: J8.2 U8.25
SWDCLK-QFAA8: J9.2 U9.25
SWDCLK-QFAA9: J10.2 U10.25
SWDCLK-QFAA10: J11.2 U11.25
SWDCLK-QFAA11: J12.2 U12.25
SWDCLK-QFAA12: J13.2 U13.25
SWDCLK-QFAA13: J14.2 U14.25
SWDCLK-QFAA14: J15.2 U15.25
SWDCLK-QFAA15: J16.2 U16.25
SWDCLK-QFAA16: J17.2 U17.25
SWDCLK-QFAA17: J18.2 U18.25
SWDCLK-QFAA18: J19.2 U19.25
SWDCLK-QFAA19: J20.2 U20.25
SWDCLK-QFAA20: J21.2 U21.25
SWDCLK-QFAA21: J22.2 U22.25
SWDCLK-QFAA22: J23.2 U23.25
SWDCLK-QFAA23: J24.2 U24.25
SWDCLK-QFAA24: J25.2 U25.25
SWDIO-QFAA: J2.1 U1.26
SWDIO-QFAA1: J1.1 U2.26
SWDIO-QFAA2: J3.1 U3.26
SWDIO-QFAA3: J4.1 U4.26
SWDIO-QFAA4: J5.1 U5.26
SWDIO-QFAA5: J6.1 U6.26
SWDIO-QFAA6: J7.1 U7.26
SWDIO-QFAA7: J8.1 U8.26
SWDIO-QFAA8: J9.1 U9.26
SWDIO-QFAA9: J10.1 U10.26
SWDIO-QFAA10: J11.1 U11.26
SWDIO-QFAA11: J12.1 U12.26
SWDIO-QFAA12: J13.1 U13.26
SWDIO-QFAA13: J14.1 U14.26
SWDIO-QFAA14: J15.1 U15.26
SWDIO-QFAA15: J16.1 U16.26
SWDIO-QFAA16: J17.1 U17.26
SWDIO-QFAA17: J18.1 U18.26
SWDIO-QFAA18: J19.1 U19.26
SWDIO-QFAA19: J20.1 U20.26
SWDIO-QFAA20: J21.1 U21.26
SWDIO-QFAA21: J22.1 U22.26
SWDIO-QFAA22: J23.1 U23.26
SWDIO-QFAA23: J24.1 U24.26
SWDIO-QFAA24: J25.1 U25.26
VDD: C3.2 C4.2 J2.3 U1.13 U1.36 U1.48 U$2.P$3
VDD1: C10.2 C11.2 J1.3 U2.13 U2.36 U2.48 U$5.P$3
VDD2: C17.2 C18.2 J3.3 U3.13 U3.36 U3.48 U$12.P$3
VDD3: C24.2 C25.2 J4.3 U4.13 U4.36 U4.48 U$17.P$3
VDD4: C31.2 C32.2 J5.3 U5.13 U5.36 U5.48 U$22.P$3
VDD5: C38.2 C39.2 J6.3 U6.13 U6.36 U6.48 U$27.P$3
VDD6: C45.2 C46.2 J7.3 U7.13 U7.36 U7.48 U$32.P$3
VDD7: C52.2 C53.2 J8.3 U8.13 U8.36 U8.48 U$37.P$3
VDD8: C59.2 C60.2 J9.3 U9.13 U9.36 U9.48 U$42.P$3
VDD9: C66.2 C67.2 J10.3 U10.13 U10.36 U10.48 U$47.P$3
VDD10: C73.2 C74.2 J11.3 U11.13 U11.36 U11.48 U$52.P$3
VDD11: C80.2 C81.2 J12.3 U12.13 U12.36 U12.48 U$57.P$3
VDD12: C87.2 C88.2 J13.3 U13.13 U13.36 U13.48 U$62.P$3
VDD13: C94.2 C95.2 J14.3 U14.13 U14.36 U14.48 U$67.P$3
VDD14: C101.2 C102.2 J15.3 U15.13 U15.36 U15.48 U$72.P$3
VDD15: C108.2 C109.2 J16.3 U16.13 U16.36 U16.48 U$77.P$3
VDD16: C115.2 C116.2 J17.3 U17.13 U17.36 U17.48 U$82.P$3
VDD17: C122.2 C123.2 J18.3 U18.13 U18.36 U18.48 U$87.P$3
VDD18: C129.2 C130.2 J19.3 U19.13 U19.36 U19.48 U$92.P$3
VDD19: C136.2 C137.2 J20.3 U20.13 U20.36 U20.48 U$97.P$3
VDD20: C143.2 C144.2 J21.3 U21.13 U21.36 U21.48 U$102.P$3
VDD21: C150.2 C151.2 J22.3 U22.13 U22.36 U22.48 U$107.P$3
VDD22: C157.2 C158.2 J23.3 U23.13 U23.36 U23.48 U$112.P$3
VDD23: C164.2 C165.2 J24.3 U24.13 U24.36 U24.48 U$117.P$3
VDD24: C171.2 C172.2 J25.3 U25.13 U25.36 U25.48 U$122.P$3
WP_FLASH: U1.38 U$3.7
WP_FLASH1: U2.38 U$10.7
WP_FLASH2: U3.38 U$15.7
WP_FLASH3: U4.38 U$20.7
WP_FLASH4: U5.38 U$25.7
WP_FLASH5: U6.38 U$30.7
WP_FLASH6: U7.38 U$35.7
WP_FLASH7: U8.38 U$40.7
WP_FLASH8: U9.38 U$45.7
WP_FLASH9: U10.38 U$50.7
WP_FLASH10: U11.38 U$55.7
WP_FLASH11: U12.38 U$60.7
WP_FLASH12: U13.38 U$65.7
WP_FLASH13: U14.38 U$70.7
WP_FLASH14: U15.38 U$75.7
WP_FLASH15: U16.38 U$80.7
WP_FLASH16: U17.38 U$85.7
WP_FLASH17: U18.38 U$90.7
WP_FLASH18: U19.38 U$95.7
WP_FLASH19: U20.38 U$100.7
WP_FLASH20: U21.38 U$105.7
WP_FLASH21: U22.38 U$110.7
WP_FLASH22: U23.38 U$115.7
WP_FLASH23: U24.38 U$120.7
WP_FLASH24: U25.38 U$125.7
XC1-QFAA: C7.2 U1.34 U$6.1
XC1-QFAA1: C14.2 U2.34 U$8.1
XC1-QFAA2: C21.2 U3.34 U$13.1
XC1-QFAA3: C28.2 U4.34 U$18.1
XC1-QFAA4: C35.2 U5.34 U$23.1
XC1-QFAA5: C42.2 U6.34 U$28.1
XC1-QFAA6: C49.2 U7.34 U$33.1
XC1-QFAA7: C56.2 U8.34 U$38.1
XC1-QFAA8: C63.2 U9.34 U$43.1
XC1-QFAA9: C70.2 U10.34 U$48.1
XC1-QFAA10: C77.2 U11.34 U$53.1
XC1-QFAA11: C84.2 U12.34 U$58.1
XC1-QFAA12: C91.2 U13.34 U$63.1
XC1-QFAA13: C98.2 U14.34 U$68.1
XC1-QFAA14: C105.2 U15.34 U$73.1
XC1-QFAA15: C112.2 U16.34 U$78.1
XC1-QFAA16: C119.2 U17.34 U$83.1
XC1-QFAA17: C126.2 U18.34 U$88.1
XC1-QFAA18: C133.2 U19.34 U$93.1
XC1-QFAA19: C140.2 U20.34 U$98.1
XC1-QFAA20: C147.2 U21.34 U$103.1
XC1-QFAA21: C154.2 U22.34 U$108.1
XC1-QFAA22: C161.2 U23.34 U$113.1
XC1-QFAA23: C168.2 U24.34 U$118.1
XC1-QFAA24: C175.2 U25.34 U$123.1
XC2-QFAA: C6.2 U1.35 U$6.3
XC2-QFAA1: C13.2 U2.35 U$8.3
XC2-QFAA2: C20.2 U3.35 U$13.3
XC2-QFAA3: C27.2 U4.35 U$18.3
XC2-QFAA4: C34.2 U5.35 U$23.3
XC2-QFAA5: C41.2 U6.35 U$28.3
XC2-QFAA6: C48.2 U7.35 U$33.3
XC2-QFAA7: C55.2 U8.35 U$38.3
XC2-QFAA8: C62.2 U9.35 U$43.3
XC2-QFAA9: C69.2 U10.35 U$48.3
XC2-QFAA10: C76.2 U11.35 U$53.3
XC2-QFAA11: C83.2 U12.35 U$58.3
XC2-QFAA12: C90.2 U13.35 U$63.3
XC2-QFAA13: C97.2 U14.35 U$68.3
XC2-QFAA14: C104.2 U15.35 U$73.3
XC2-QFAA15: C111.2 U16.35 U$78.3
XC2-QFAA16: C118.2 U17.35 U$83.3
XC2-QFAA17: C125.2 U18.35 U$88.3
XC2-QFAA18: C132.2 U19.35 U$93.3
XC2-QFAA19: C139.2 U20.35 U$98.3
XC2-QFAA20: C146.2 U21.35 U$103.3
XC2-QFAA21: C153.2 U22.35 U$108.3
XC2-QFAA22: C160.2 U23.35 U$113.3
XC2-QFAA23: C167.2 U24.35 U$118.3
XC2-QFAA24: C174.2 U25.35 U$123.3

## Tracks (layer width: path | path; a pad name or v marks a point on that pad's centre or on a via)
ADXL_POWER-QFAA  (via drill 0.25)
  Top 0.152: U1.10 16.05,50.96 16.4,50.61 v16.71,50.61
  Bottom 0.152: C1.2 16.25,54.94 U$1.VDD/IO 16.86,54.73 16.64,54.51 15.88,54.51 15.79,54.42 15.79,53.2 16.4,53.2 | 16.4,53.2 16.54,53.2 U$1.VS | v16.71,50.61 16.71,51.52 16.4,51.83 16.4,53.2
ADXL_POWER-QFAA1  (via drill 0.25)
  Top 0.152: U2.10 40.05,50.96 40.4,50.61 v40.71,50.61
  Bottom 0.152: C8.2 40.25,54.94 U$4.VDD/IO 40.86,54.73 40.64,54.51 39.88,54.51 39.79,54.42 39.79,53.2 40.4,53.2 | 40.4,53.2 40.54,53.2 U$4.VS | v40.71,50.61 40.71,51.52 40.4,51.83 40.4,53.2
ADXL_POWER-QFAA2  (via drill 0.25)
  Top 0.152: U3.10 64.05,50.96 64.4,50.61 v64.71,50.61
  Bottom 0.152: C15.2 64.25,54.94 U$11.VDD/IO 64.86,54.73 64.64,54.51 63.88,54.51 63.79,54.42 63.79,53.2 64.4,53.2 | 64.4,53.2 64.54,53.2 U$11.VS | v64.71,50.61 64.71,51.52 64.4,51.83 64.4,53.2
ADXL_POWER-QFAA3  (via drill 0.25)
  Top 0.152: U4.10 88.05,50.96 88.4,50.61 v88.71,50.61
  Bottom 0.152: C22.2 88.25,54.94 U$16.VDD/IO 88.86,54.73 88.64,54.51 87.88,54.51 87.79,54.42 87.79,53.2 88.4,53.2 | 88.4,53.2 88.54,53.2 U$16.VS | v88.71,50.61 88.71,51.52 88.4,51.83 88.4,53.2
ADXL_POWER-QFAA4  (via drill 0.25)
  Top 0.152: U5.10 112.05,50.96 112.4,50.61 v112.71,50.61
  Bottom 0.152: C29.2 112.25,54.94 U$21.VDD/IO 112.86,54.73 112.64,54.51 111.88,54.51 111.79,54.42 111.79,53.2 112.4,53.2 | 112.4,53.2 112.54,53.2 U$21.VS | v112.71,50.61 112.71,51.52 112.4,51.83 112.4,53.2
ADXL_POWER-QFAA5  (via drill 0.25)
  Top 0.152: U6.10 16.05,30.96 16.4,30.61 v16.71,30.61
  Bottom 0.152: C36.2 16.25,34.94 U$26.VDD/IO 16.86,34.73 16.64,34.51 15.88,34.51 15.79,34.42 15.79,33.2 16.4,33.2 | 16.4,33.2 16.54,33.2 U$26.VS | v16.71,30.61 16.71,31.52 16.4,31.83 16.4,33.2
ADXL_POWER-QFAA6  (via drill 0.25)
  Top 0.152: U7.10 40.05,30.96 40.4,30.61 v40.71,30.61
  Bottom 0.152: C43.2 40.25,34.94 U$31.VDD/IO 40.86,34.73 40.64,34.51 39.88,34.51 39.79,34.42 39.79,33.2 40.4,33.2 | 40.4,33.2 40.54,33.2 U$31.VS | v40.71,30.61 40.71,31.52 40.4,31.83 40.4,33.2
ADXL_POWER-QFAA7  (via drill 0.25)
  Top 0.152: U8.10 64.05,30.96 64.4,30.61 v64.71,30.61
  Bottom 0.152: C50.2 64.25,34.94 U$36.VDD/IO 64.86,34.73 64.64,34.51 63.88,34.51 63.79,34.42 63.79,33.2 64.4,33.2 | 64.4,33.2 64.54,33.2 U$36.VS | v64.71,30.61 64.71,31.52 64.4,31.83 64.4,33.2
ADXL_POWER-QFAA8  (via drill 0.25)
  Top 0.152: U9.10 88.05,30.96 88.4,30.61 v88.71,30.61
  Bottom 0.152: C57.2 88.25,34.94 U$41.VDD/IO 88.86,34.73 88.64,34.51 87.88,34.51 87.79,34.42 87.79,33.2 88.4,33.2 | 88.4,33.2 88.54,33.2 U$41.VS | v88.71,30.61 88.71,31.52 88.4,31.83 88.4,33.2
ADXL_POWER-QFAA9  (via drill 0.25)
  Top 0.152: U10.10 112.05,30.96 112.4,30.61 v112.71,30.61
  Bottom 0.152: C64.2 112.25,34.94 U$46.VDD/IO 112.86,34.73 112.64,34.51 111.88,34.51 111.79,34.42 111.79,33.2 112.4,33.2 | 112.4,33.2 112.54,33.2 U$46.VS | v112.71,30.61 112.71,31.52 112.4,31.83 112.4,33.2
ADXL_POWER-QFAA10  (via drill 0.25)
  Top 0.152: U11.10 112.05,10.96 112.4,10.61 v112.71,10.61